# Altium PCB SPE_To_Ethernet.PcbDoc (part 1 of 3)
Units mm, origin at the board's own origin, x right, y up, seen from the top; angles counter-clockwise.
Board outline 152.4 x 101.6 mm, 4 copper layers (Top Layer, GND, Power, Bottom Layer), stack 1.526 mm thick; 154 components, 131 nets, 628 pads, 232 vias.
Unrouted connection lines stored in the file: 149.
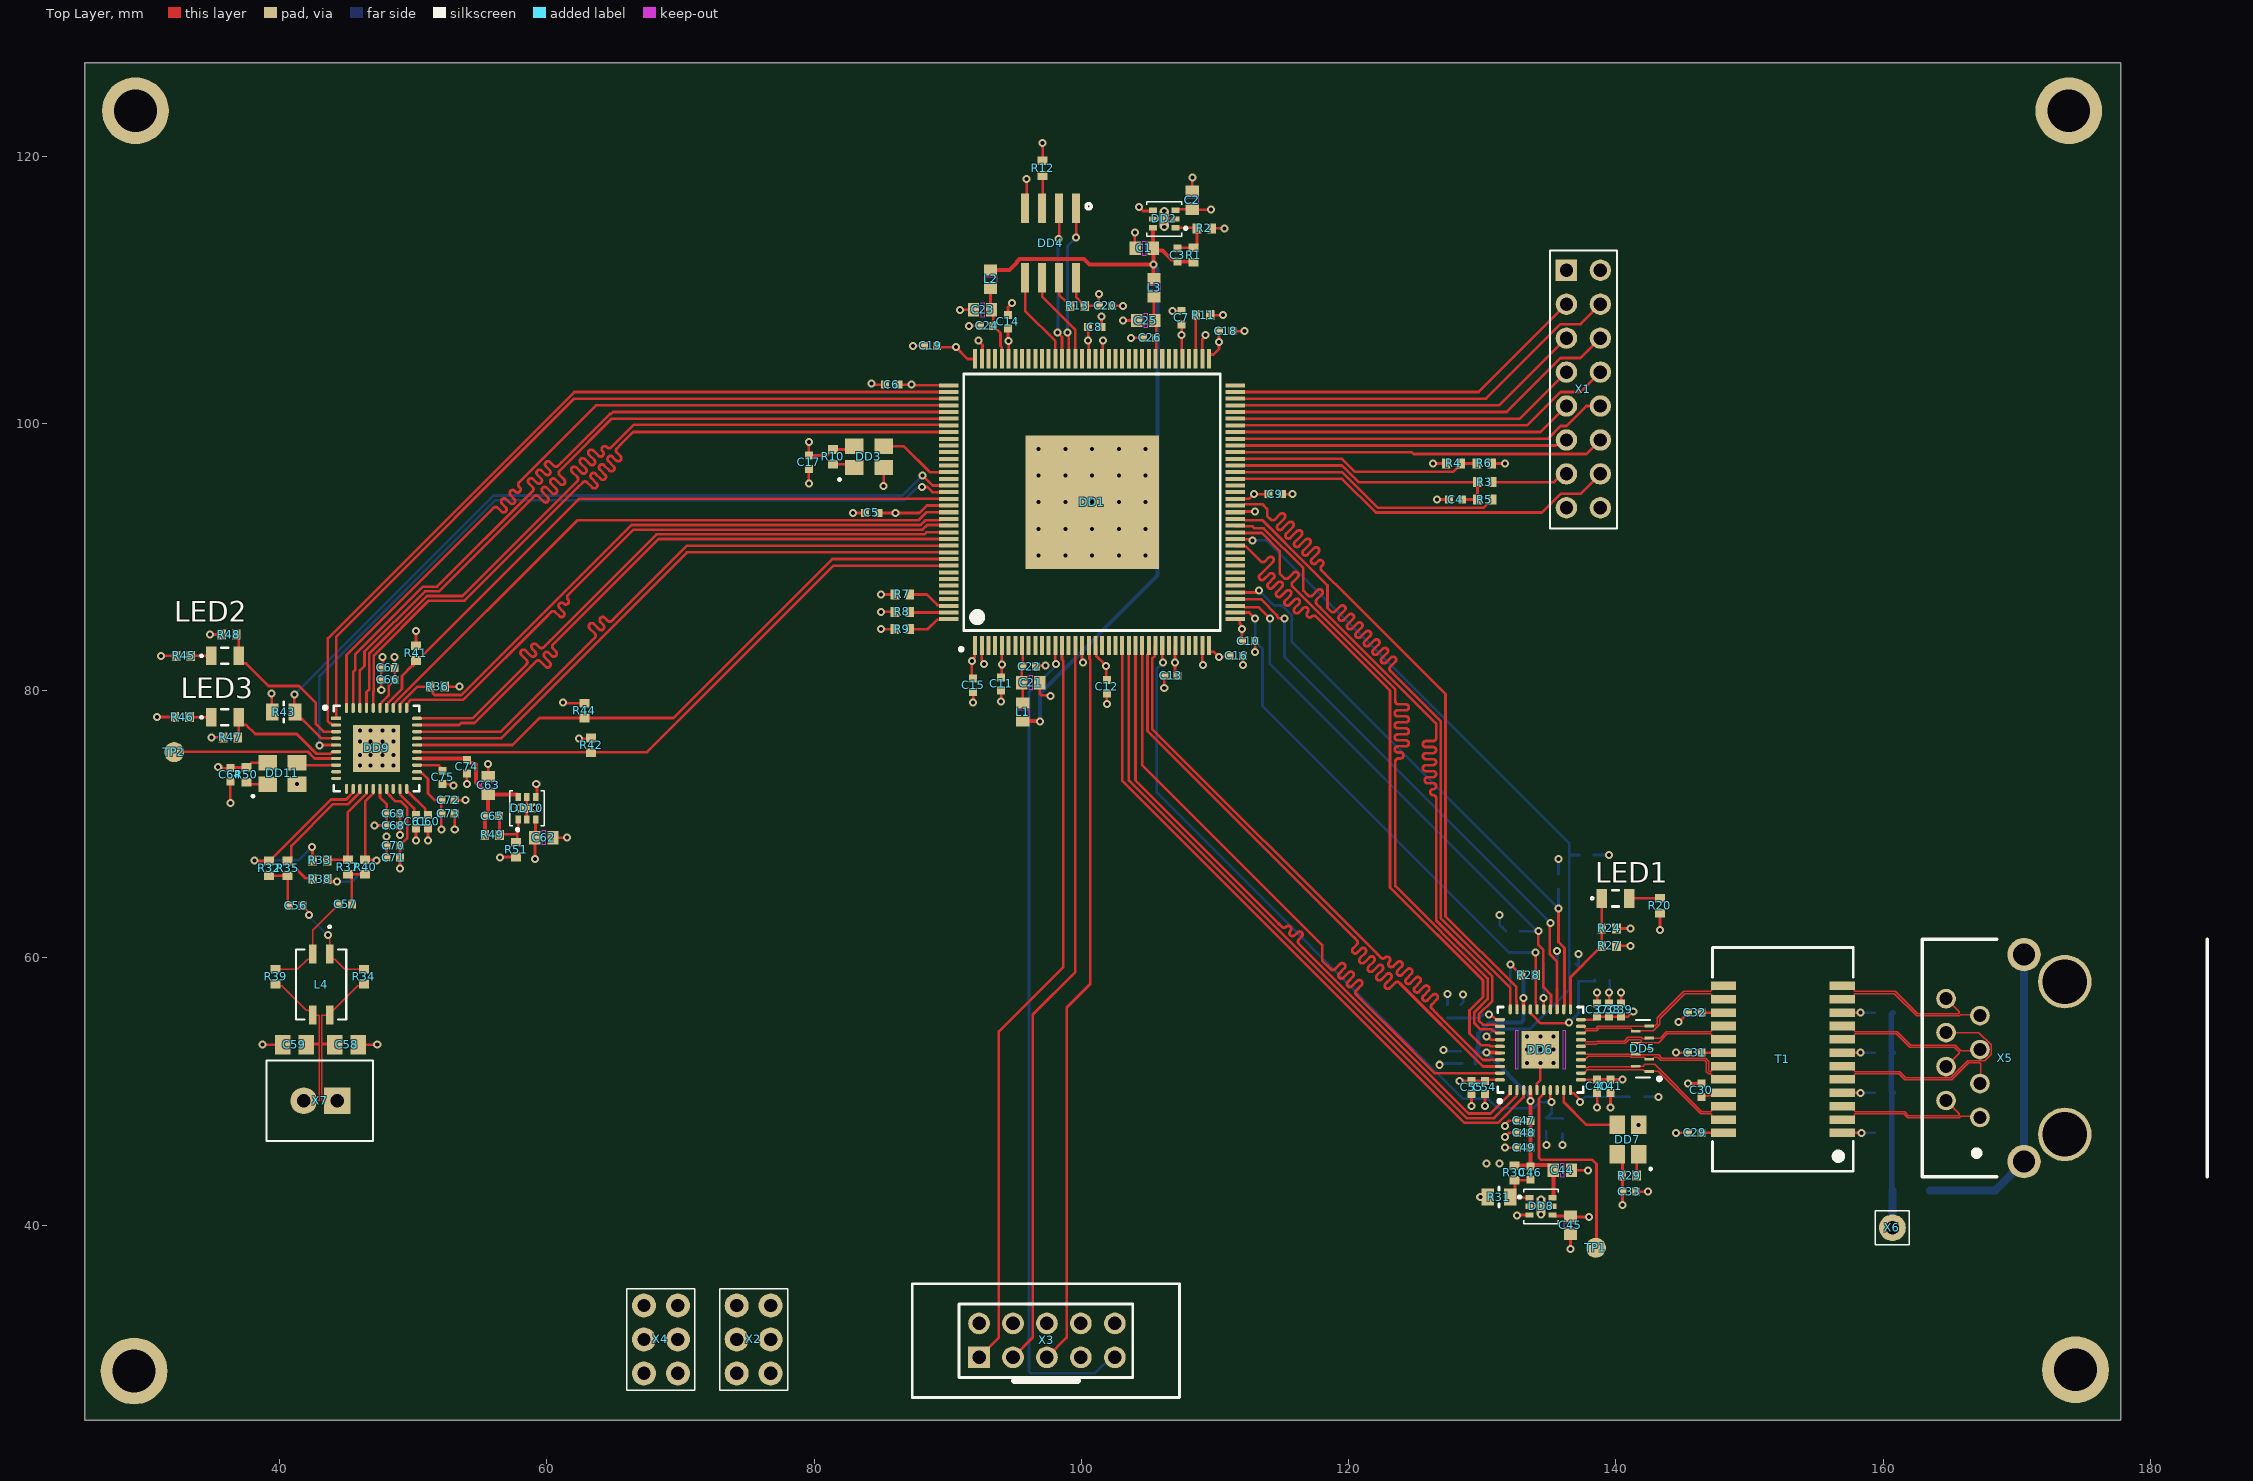
[diagram p0: Top Layer view]
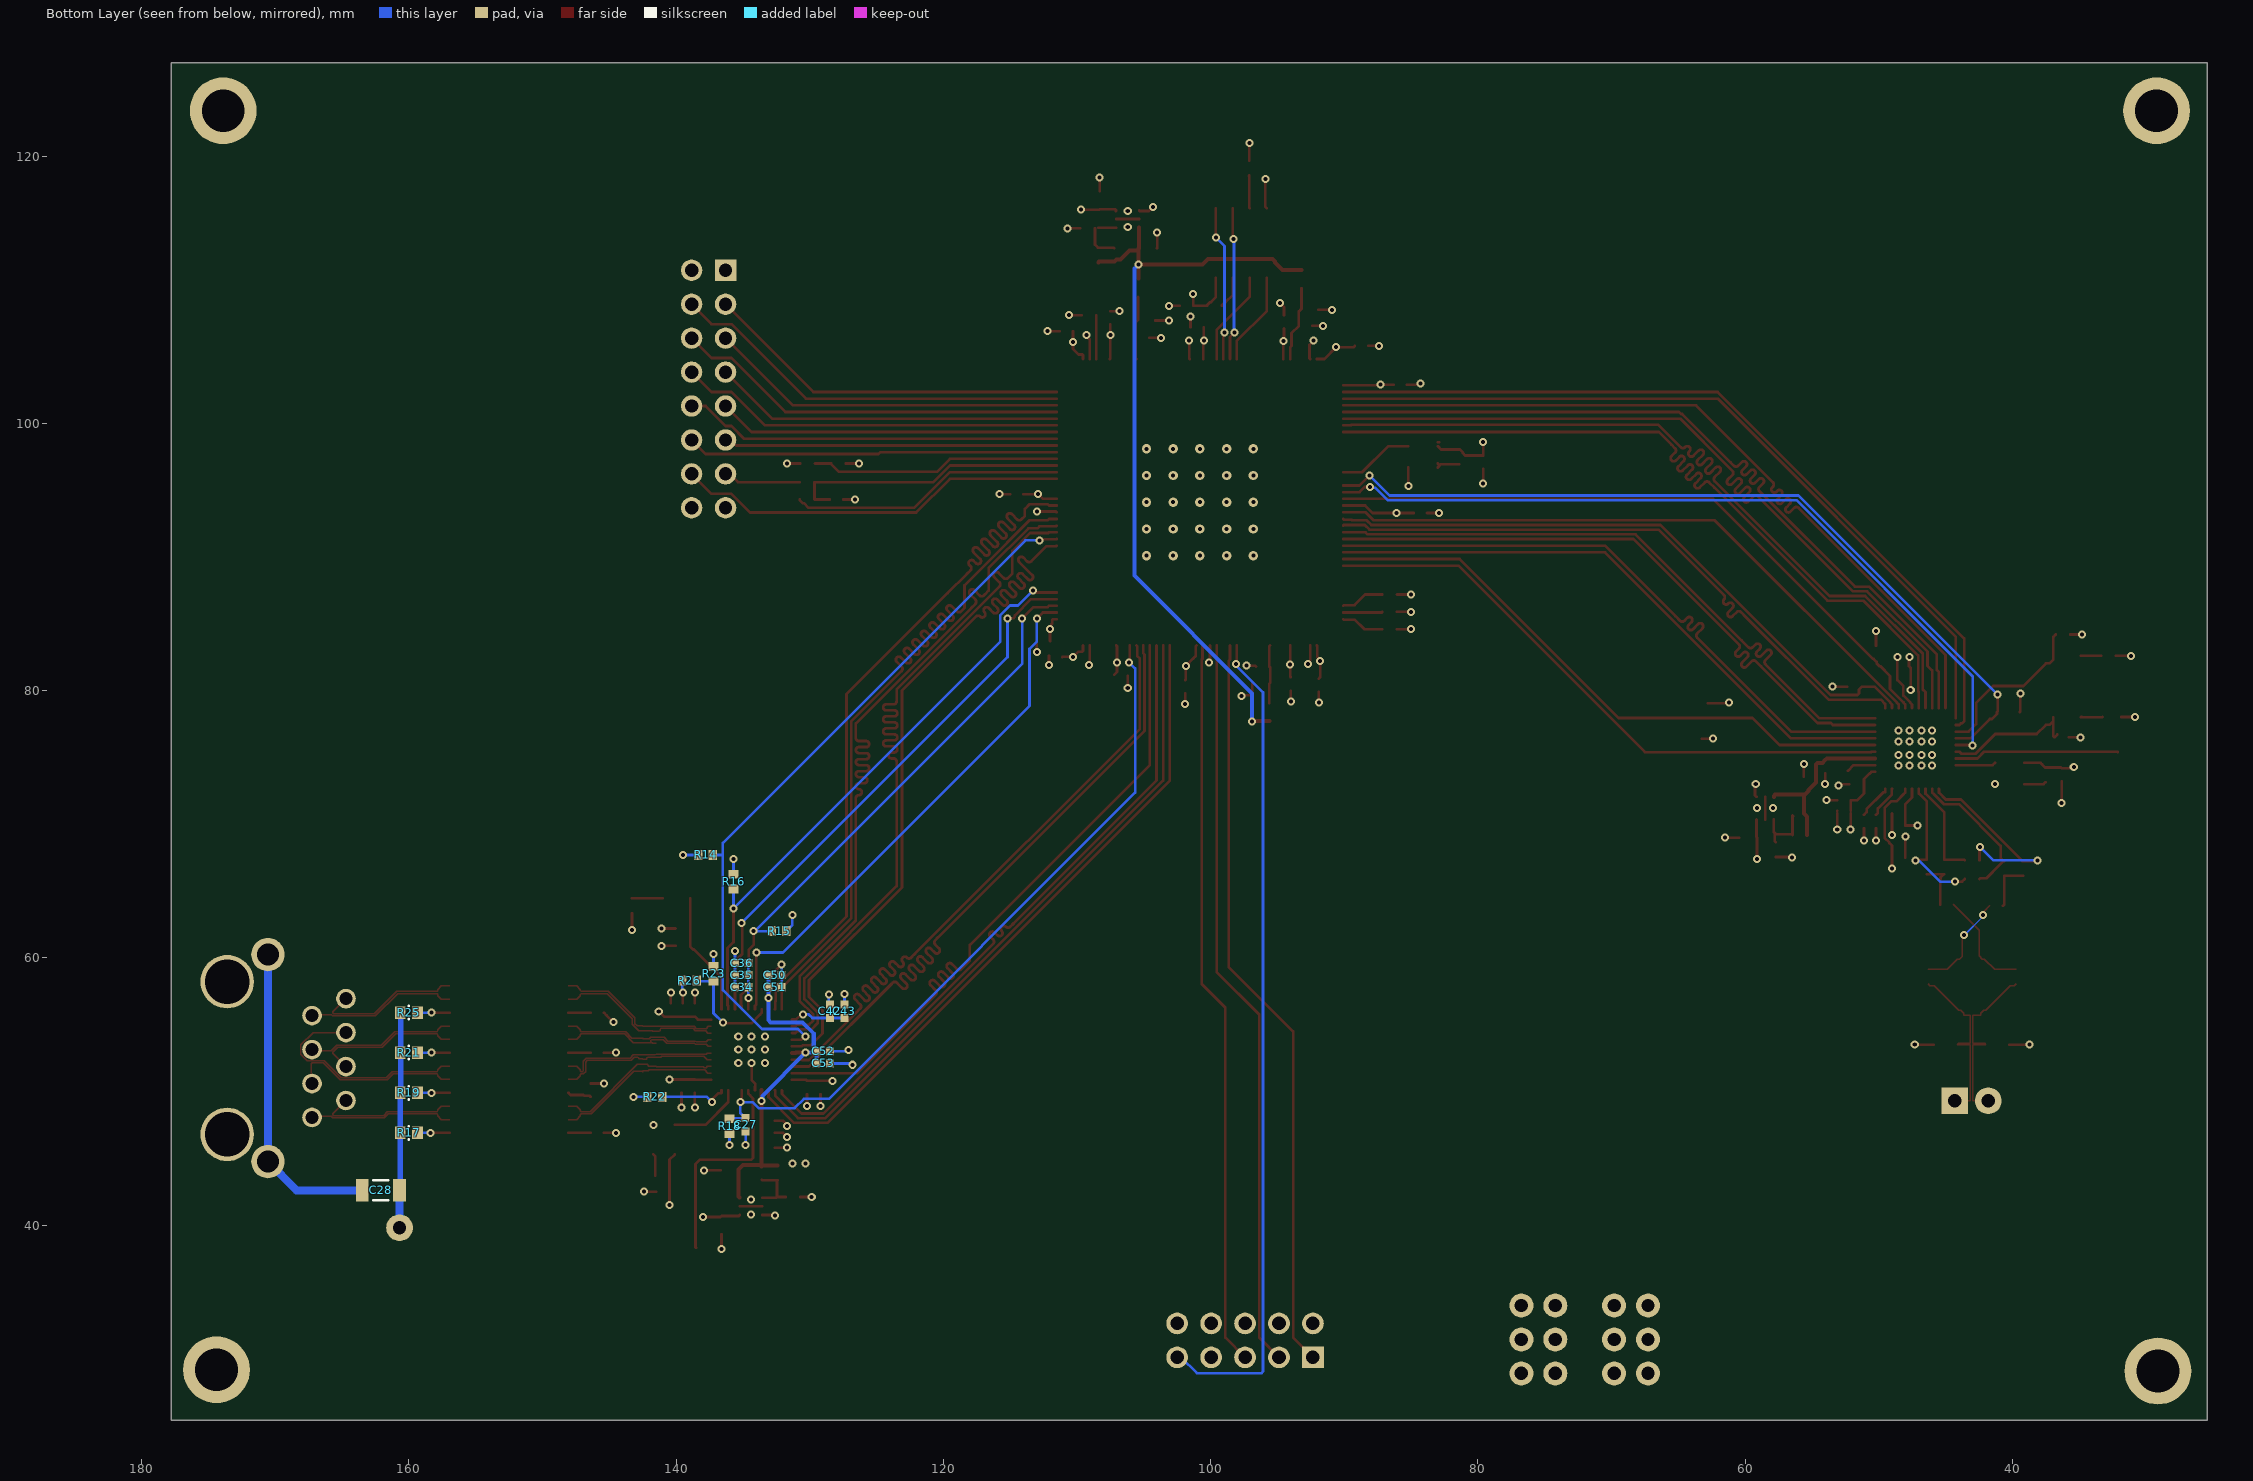
[diagram p1: Bottom Layer view, seen from below]
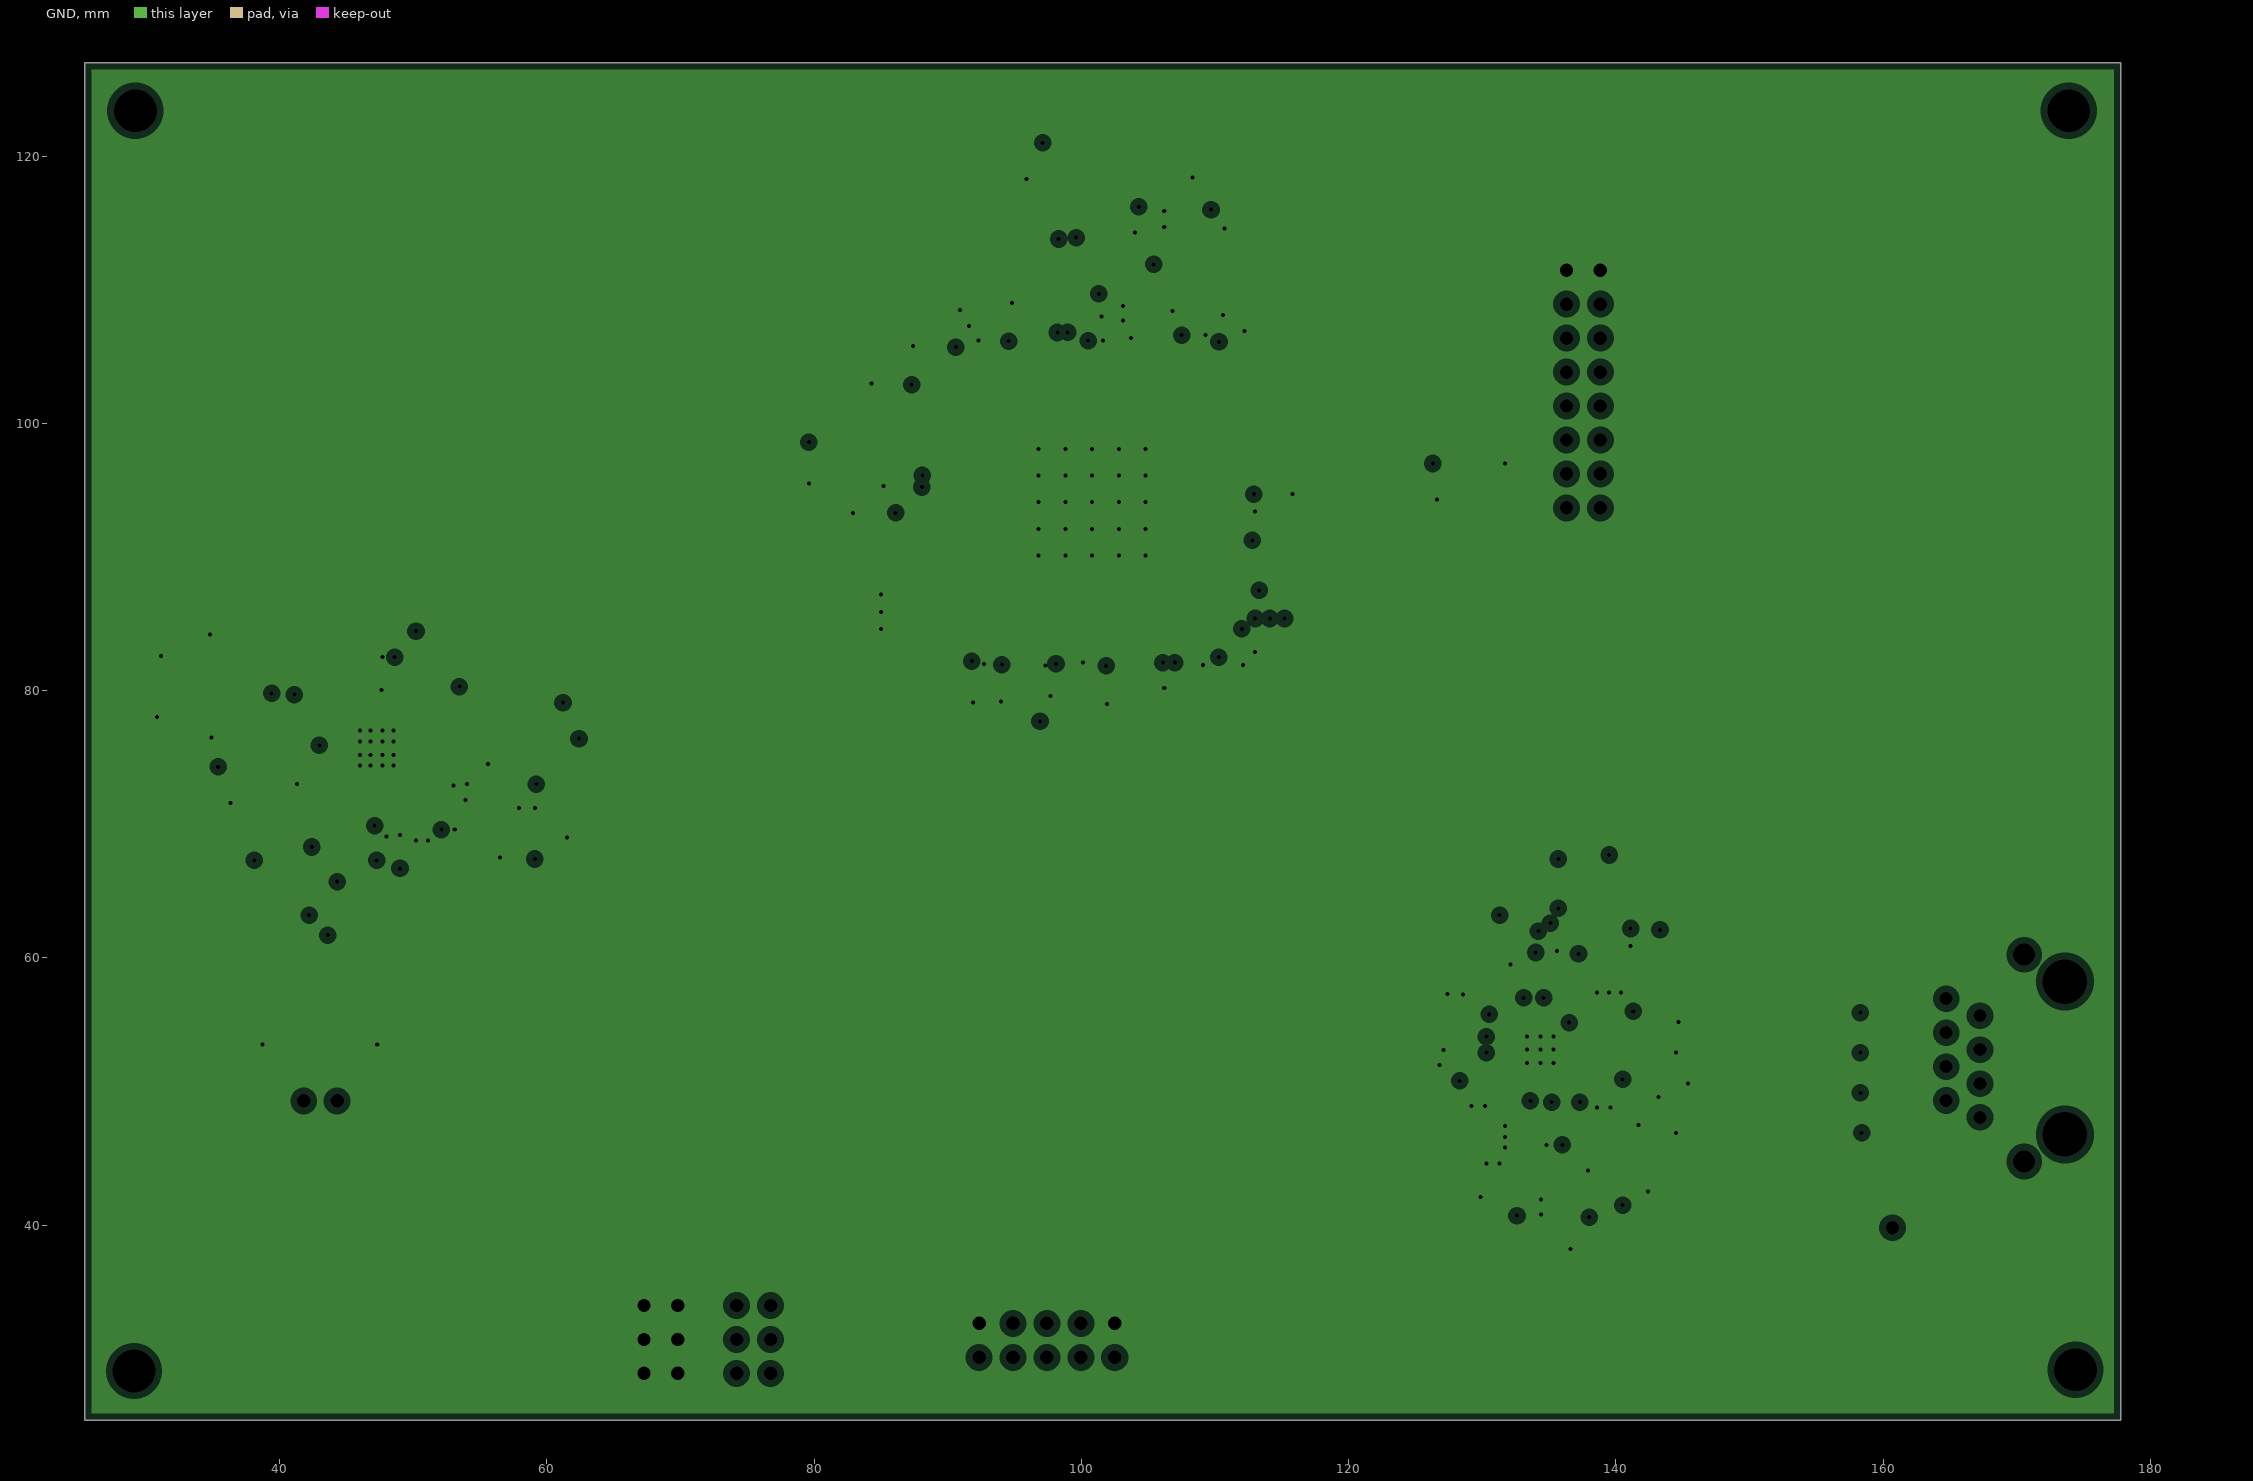
[diagram p2: GND, clearances drawn from the general rule]
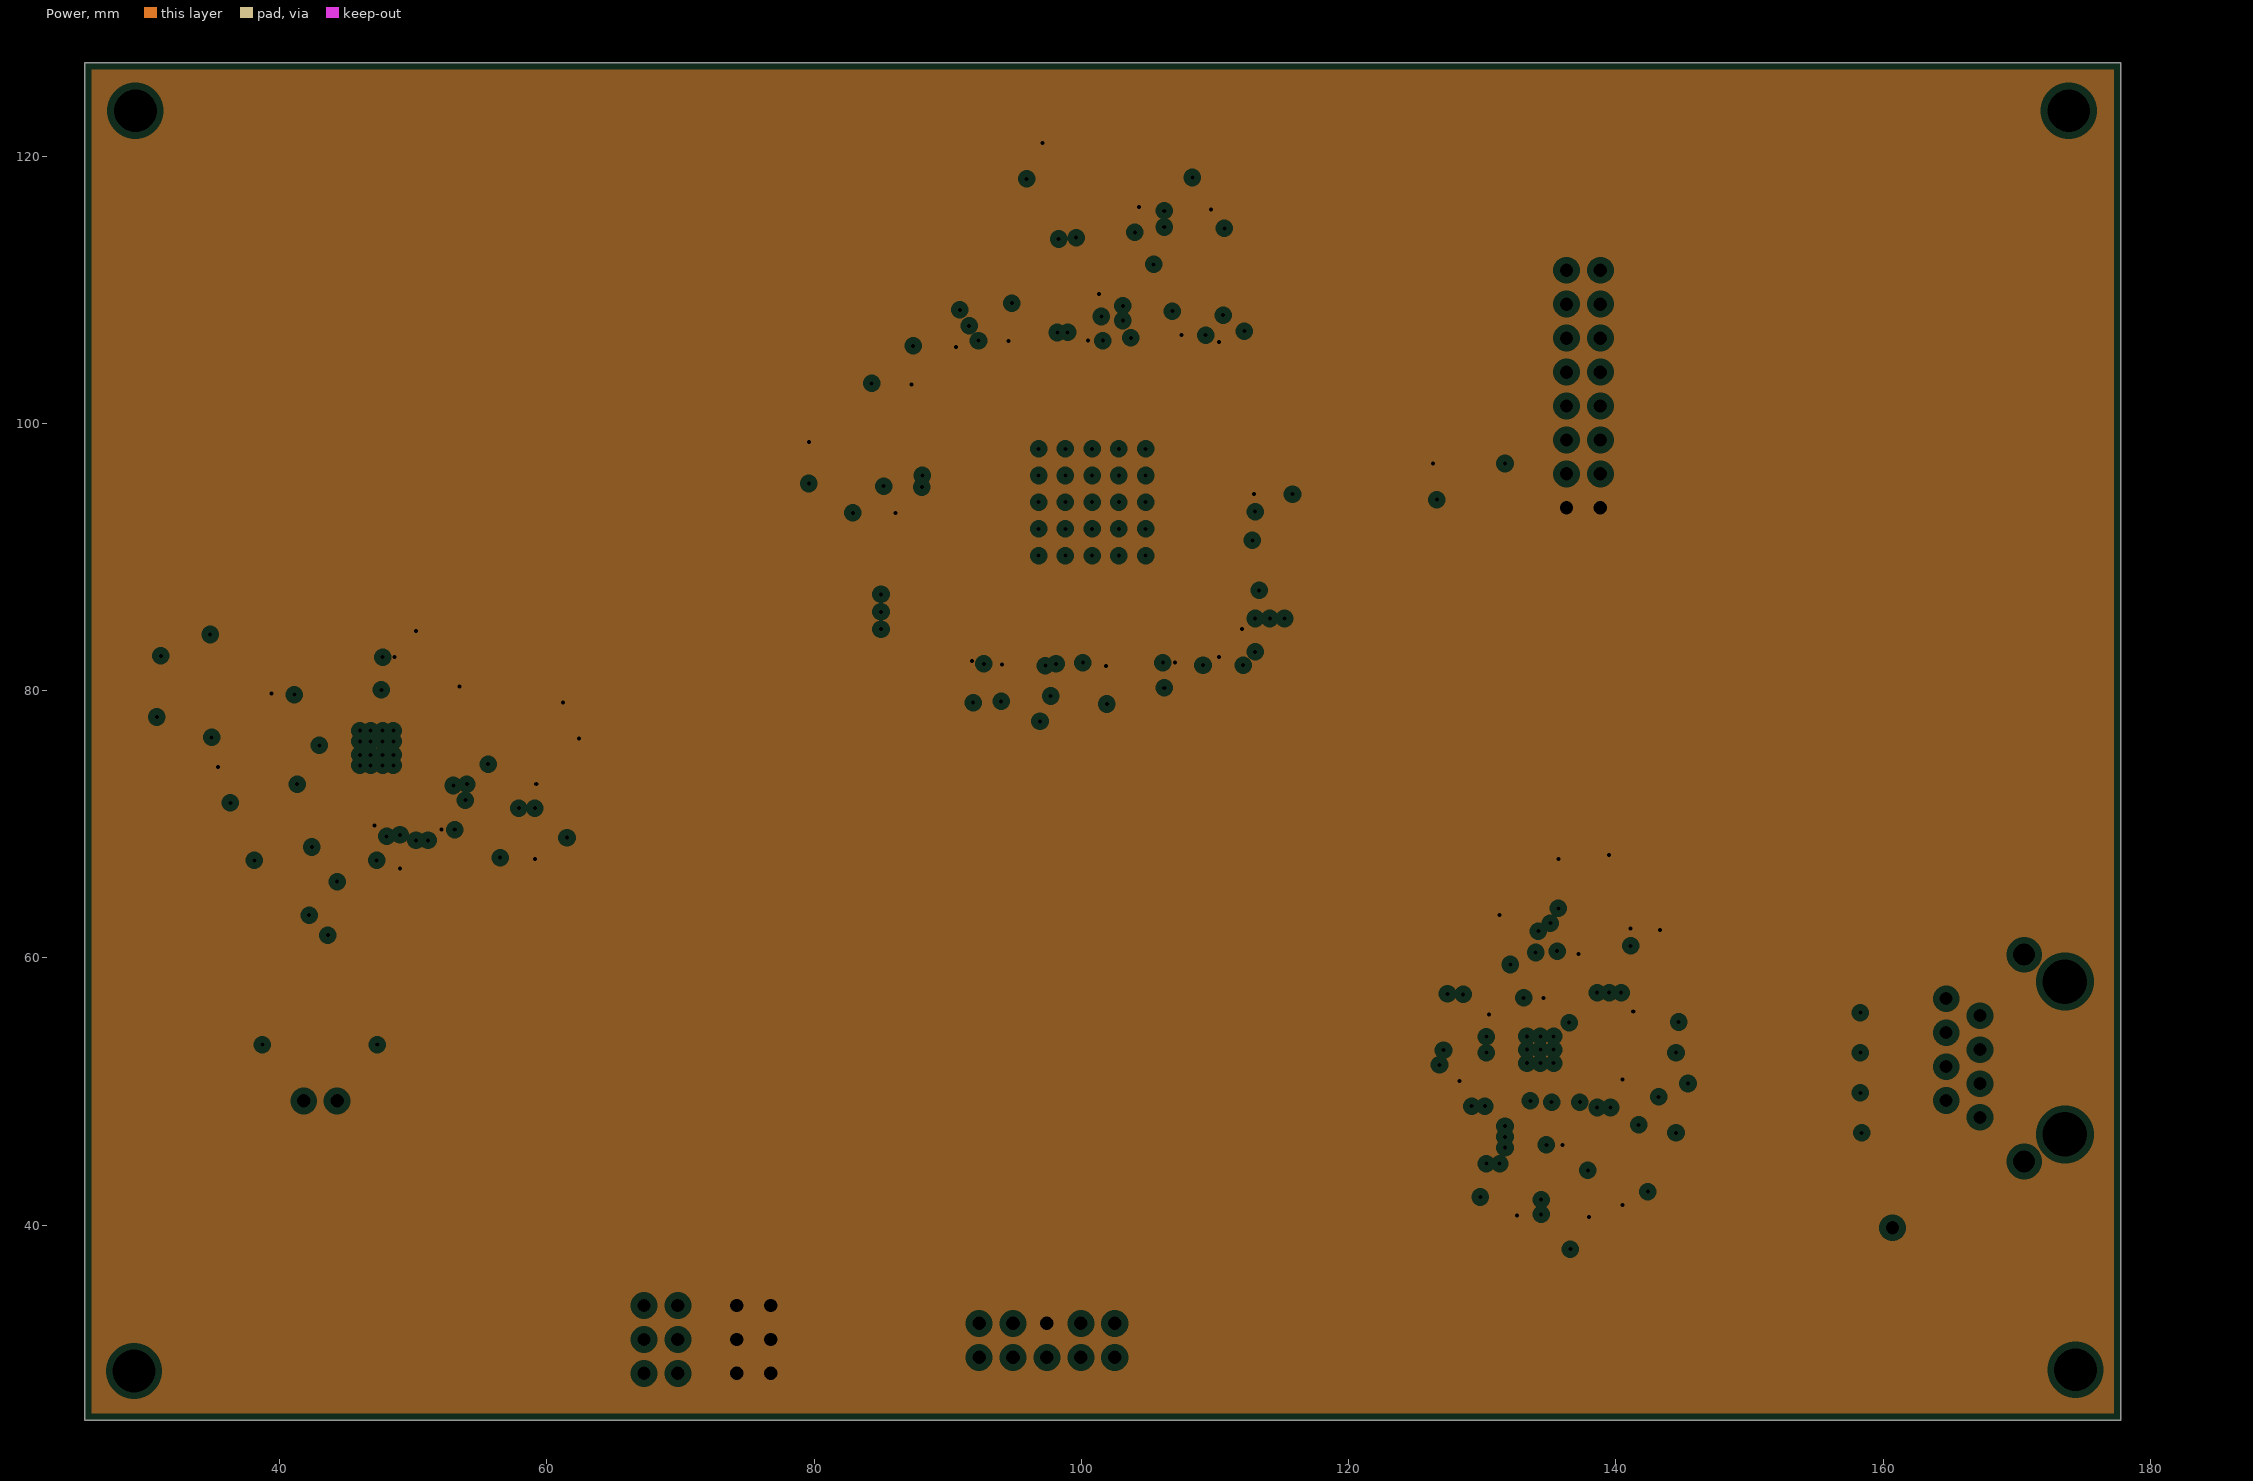
[diagram p3: Power, clearances drawn from the general rule]
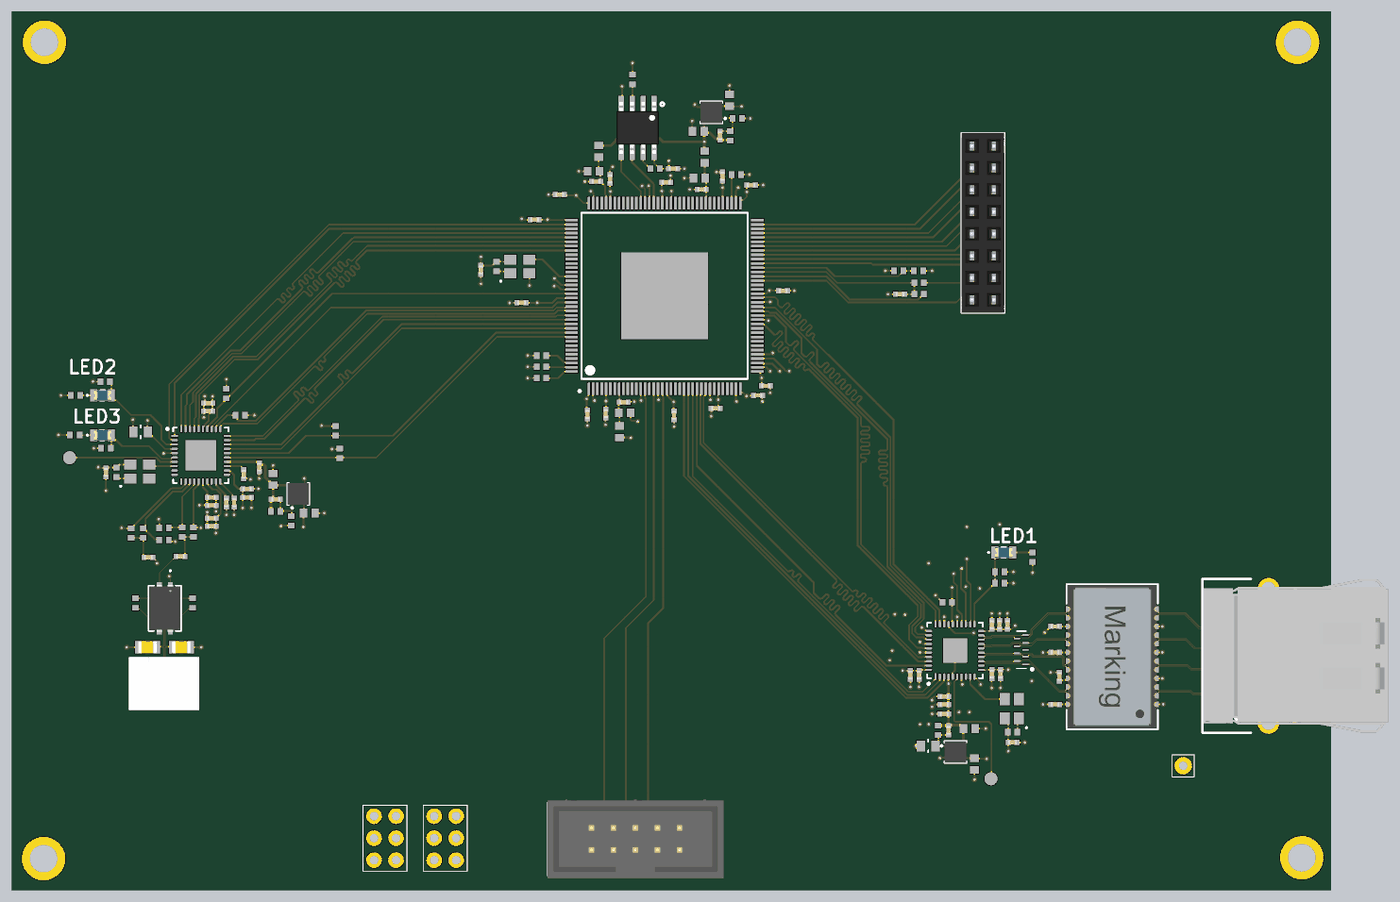
[diagram p5: 3D render of the assembled board from above, using the file's embedded part models]

## Layer stack, top to bottom
Top Solder: solder mask 0.0254, SM-001, Dk 3.5
Top Layer: signal copper 0.018
Dielectric 1: prepreg 0.127, FR4, Dk 4.2
GND: plane copper 0.018, net GND
Dielectric 2: core 1.2, FR4, Dk 4.6
Power: plane copper 0.018, net +3V3
Dielectric 3: prepreg 0.127, FR4, Dk 4.2
Bottom Layer: signal copper 0.018
Bottom Solder: solder mask 0.0254, SM-001, Dk 3.5

## Board outline
25.4,25.4 177.8,25.4 177.8,127 25.4,127

## Design rules (kind name [scope] priority, off if disabled: settings)
AssemblyTestPointUsage [All] p1: valid=2
AssemblyTestpoint [(IsPad And (OnTopLayer Or OnBottomLayer)) Or (IsVia) Or (IsPad And OnMultiLayer)] p1: testpointundercomponent=TRUE minsize=0.5 maxsize=2.54 preferedsize=1.524 minholesize=0 maxholesize=1.016 preferedholesize=0.813 testpointgrid=0.1 usegrid=FALSE gridtolerance=0 allowsidetop=TRUE allowsidebottom=TRUE
BoardOutlineClearance BoardOutlineClearance_1 [InComponent('X2') and OnTopSilkscreen] p1: gap=0 ignorepadtopadclearanceinfootprint=FALSE
BoardOutlineClearance [All] p2: gap=0.254 ignorepadtopadclearanceinfootprint=FALSE except(0: Arc-SplitContinuation Track-SplitContinuation SMDPad-SplitContinuation THPad-SplitContinuation Via-SplitContinuation Fill-SplitContinuation Poly-SplitContinuation Region-SplitContinuation Text-SplitContinuation)
Clearance [All] p1: gap=0.05 ignorepadtopadclearanceinfootprint=FALSE
DiffPairsRouting [All] p1: maxlimit=0.066 minlimit=0.066 mostfreqgap=0.066 toplayer_minwidth=0.1 toplayer_maxwidth=0.1 toplayer_prefwidth=0.1 bottomlayer_minwidth=0.1 bottomlayer_maxwidth=0.1 bottomlayer_prefwidth=0.1 impedanceprofiledriven=TRUE impedanceprofileid={1806372A-07BC-4097-8CD0-4FA6E6E3F08C} impedanceprofilevalue=100.000000 maxuncoupledlength=12.7
FabricationTestPointUsage [All] p1: valid=2 allowmultiple=FALSE
FabricationTestpoint [(IsPad And (OnTopLayer Or OnBottomLayer)) Or (IsVia) Or (IsPad And OnMultiLayer)] p1: side=3 testpointundercomponent=TRUE minsize=0.5 maxsize=2.54 preferedsize=1.524 minholesize=0 maxholesize=1.016 preferedholesize=0.813 testpointgrid=0.1 allowsidetop=TRUE allowsidebottom=TRUE usegrid=FALSE gridtolerance=0
HoleSize [All] p1: absolutevalues=TRUE maxlimit=4 minlimit=0.025 maxpercent=80.000 minpercent=20.000
LayerPairs LayerPairs_1 [IsDesignator] p1: enforce=TRUE
LayerPairs [All] p2: enforce=TRUE
Length [InxSignalClass('All xSignals')] p1: maxlimit=150 minlimit=0
MatchedLengths MatchLengths_SPE_Rx [InxSignalClass('SPE_Rx')] p1: tolerance=2 checknetsindiffpair=FALSE checkdiffpairvsdiffpair=TRUE checkxsignals=TRUE checkothers=TRUE
MatchedLengths MatchLengths_SPE_Tx [InxSignalClass('SPE_Tx')] p2: tolerance=2 checknetsindiffpair=FALSE checkdiffpairvsdiffpair=TRUE checkxsignals=TRUE checkothers=TRUE
MatchedLengths MatchLengths_ETH_Rx [InxSignalClass('ETH_Rx')] p3: tolerance=2 checknetsindiffpair=FALSE checkdiffpairvsdiffpair=TRUE checkxsignals=TRUE checkothers=TRUE
MatchedLengths MatchLengths_ETH_Tx [InxSignalClass('ETH_Tx')] p4: tolerance=2 checknetsindiffpair=FALSE checkdiffpairvsdiffpair=TRUE checkxsignals=TRUE checkothers=TRUE
MatchedLengths [InDifferentialPair('D1') and InDifferentialPair('D2') and InDifferentialPair('D3') and InDifferentialPair('D4')] p5: tolerance=0.25 checknetsindiffpair=TRUE checkdiffpairvsdiffpair=FALSE checkxsignals=FALSE checkothers=FALSE
MinimumAnnularRing MinimumAnnularRing_Via [All] p1: minimumring=0.15
MinimumAnnularRing [All] p2: minimumring=0.2
MinimumSolderMaskSliver [All] p1: minsoldermaskwidth=0
PlaneClearance [All] p1: clearance=0.508
PlaneConnect [All] p1: pad.planeconnectstyle=Relief pad.reliefexpansion=0.3 pad.reliefentries=4 pad.reliefconductorwidth=0.3 pad.reliefairgap=0.3 via.planeconnectstyle=Direct via.reliefexpansion=0.3 via.reliefentries=4 via.reliefconductorwidth=0.3 via.reliefairgap=0.3
PolygonConnect PolygonConnect_1 [All vs IsVia] p1: connectstyle=Direct reliefconductorwidth=0.254 reliefentries=4 polygonreliefangle="90 Angle" airgapwidth=0.254
PolygonConnect [All] p2: connectstyle=Relief reliefconductorwidth=0.254 reliefentries=4 polygonreliefangle="90 Angle" airgapwidth=0.254
RoutingVias [All] p1: holewidth=0.3 width=0.6 viastyle="Through Hole" minholewidth=0.3 minwidth=0.6 maxholewidth=1 maxwidth=5
SilkToSilkClearance [All] p1: silktosilkclearance=0.1
SilkToSolderMaskClearance [IsPad] p1: minsilkscreentomaskgap=0.1 clearancetoexposedcopper=TRUE
SolderMaskExpansion SolderMaskExpansion_Via [IsVia] p1: expansion=0.102 istentingtop=TRUE
SolderMaskExpansion [All] p2: expansion=0.102 istentingtop=FALSE
Width Width_50 [InNetClass('50Ohm')] p1: maxlimit=0.143 minlimit=0.143 preferedwidth=0.143 impedanceprofiledriven=TRUE minimp=50.000000 maximp=50.000000 favimp=50.000000
Width [All] p2: maxlimit=2 minlimit=0.1 preferedwidth=0.2
18 further rules are at their usual default settings.

## Classes and differential pairs
differential pair class Diff_100: D1_3 D2_3 D3_3 D4_3 MDI_0_3 MDI_1_3 MDI_2_3 MDI_3_3
net class Diff_pair: D1_3_N D1_3_P D2_3_N D2_3_P D3_3_N D3_3_P D4_3_N D4_3_P MDI_0_3_N MDI_0_3_P MDI_1_3_N MDI_1_3_P MDI_2_3_N MDI_2_3_P MDI_3_3_N MDI_3_3_P
component class U_SPE_Phy: C56 C57 C58 C59 C60 C61 C62 C63 C64 C65 C66 C67 C68 C69 C70 C71 C72 C73 C74 C75 DD9 DD10 DD11 L4 LED2 LED3 R32 R33 R34 R35 R36 R37 R38 R39 R40 R41 R42 R43 R44 R45 R46 R47 R48 R49 R50 R51 TP2 X7
component class U_FPGA: C1 C2 C3 C4 C5 C6 C7 C8 C9 C10 C11 C12 C13 C14 C15 C16 C17 C18 C19 C20 C21 C22 C23 C24 C25 C26 DD1 DD2 DD3 DD4 L1 L2 L3 R1 R2 R3 R4 R5 R6 R7 R8 R9 R10 R11 R12 R13 X1 X2 X3 X4
component class U_Ethernet_Phy: C27 C28 C29 C30 C31 C32 C33 C34 C35 C36 C37 C38 C39 C40 C41 C42 C43 C44 C45 C46 C47 C48 C49 C50 C51 C52 C53 C54 C55 DD5 DD6 DD7 DD8 LED1 R14 R15 R16 R17 R18 R19 R20 R21 R22 R23 R24 R25 R26 R27 R28 R29 R30 R31 T1 TP1 X5 X6
differential pair MDI_3_3: +MDI_3_3_P -MDI_3_3_N
differential pair MDI_2_3: +MDI_2_3_P -MDI_2_3_N
differential pair MDI_1_3: +MDI_1_3_P -MDI_1_3_N
differential pair MDI_0_3: +MDI_0_3_P -MDI_0_3_N
differential pair DATA_4: +DATA_4_P -DATA_4_N
differential pair D4_3: +D4_3_P -D4_3_N
differential pair D3_3: +D3_3_P -D3_3_N
differential pair D2_3: +D2_3_P -D2_3_N
differential pair D1_3: +D1_3_P -D1_3_N

## Components (designator, comment, footprint, x,y, rotation, side; value= is the part's Value field where it differs from the comment)
C1 "10uF 25V" CAPC0603N 104.7,113.1 r0 top value=10uF
C2 "10uF 25V" CAPC0603N 108.3,116.7 r270 top value=10uF
C3 "22pF 50V" CAP0402 107.2,112.6 r90 top locked value=22pF
C4 "100 nF *" CAP0402 128,94.3 r0 top value="100 nF"
C5 "100 nF 50V" CAP0402 84.3,93.3 r0 top value="100 nF"
C6 "100 nF 50V" CAP0402 85.8,102.9 r0 top value="100 nF"
C7 "100 nF 50V" CAP0402 107.5,107.9 r270 top value="100 nF"
C8 "100 nF 50V" CAP0402 101,107.2 r180 top value="100 nF"
C9 "100 nF 50V" CAP0402 114.5,94.7 r180 top value="100 nF"
C10 "100 nF 50V" CAP0402 112.5,83.7 r180 top value="100 nF"
C11 "100 nF 50V" CAP0402 94,80.5 r90 top value="100 nF"
C12 "100 nF 50V" CAP0402 101.9,80.3 r90 top value="100 nF"
C13 "100 nF 50V" CAP0402 106.7,81.1 r0 top value="100 nF"
C14 "100 nF 50V" CAP0402 94.5,107.6 r270 top value="100 nF"
C15 "100 nF 50V" CAP0402 91.9,80.4 r90 top value="100 nF"
C16 "100 nF 50V" CAP0402 111.6,82.6 r180 top value="100 nF"
C17 "100nF 50V" CAP0402 79.6,97.1 r90 top value=100nF
C18 "100 nF 50V" CAP0402 110.8,106.9 r180 top value="100 nF"
C19 "100 nF 50V" CAP0402 88.7,105.8 r0 top value="100 nF"
C20 "100 nF 50V" CAP0402 101.8,108.8 r180 top value="100 nF"
C21 "10uF 25V" CAPC0603N 96.2,80.6 r180 top locked value=10uF
C22 "100 nF 50V" CAP0402 96.1,81.8 r180 top value="100 nF"
C23 "10uF 25V" CAPC0603N 92.6,108.5 r0 top value=10uF
C24 "100 nF 50V" CAP0402 92.9,107.3 r0 top locked value="100 nF"
C25 "10uF 25V" CAPC0603N 104.825,107.7 r0 top value=10uF
C26 "100 nF 50V" CAP0402 105.1,106.4 r0 top locked value="100 nF"
C27 "10nF 50V" CAP0402 134.8,47.5 r90 bottom locked value=10nF
C28 "2,2 nF 2 kV" CAPC1206(3216)150_L 162.1,42.6 r180 bottom locked value="2,2 nF"
C29 "100nF 50V" CAP0402 145.9,46.9 r0 top locked value=100nF
C30 "100nF 50V" CAP0402 146.4,50.1 r270 top locked value=100nF
C31 "100nF 50V" CAP0402 145.9,52.9 r0 top locked value=100nF
C32 "100nF 50V" CAP0402 145.9,55.9 r0 top locked value=100nF
C33 "100nF 50V" CAP0402 141,42.5 r180 top value=100nF
C34 "100nF 50V" CAP0402 135.1,57.8 r180 bottom value=100nF
C35 "10nF 50V" CAP0402 135.1,58.7 r180 bottom value=10nF
C36 "1uF 25V" CAP0402 135.1,59.6 r180 bottom value=1uF
C37 "1uF 25V" CAP0402 138.6,56.1 r270 top value=1uF
C38 "100nF 50V" CAP0402 139.5,56.1 r270 top value=100nF
C39 "10nF 50V" CAP0402 140.4,56.1 r270 top value=10nF
C40 "100nF 50V" CAP0402 138.6,50.4 r90 top value=100nF
C41 "10nF 50V" CAP0402 139.6,50.4 r90 top value=10nF
C42 "100nF 50V" CAP0402 128.5,56 r270 bottom value=100nF
C43 "10nF 50V" CAP0402 127.4,56 r270 bottom value=10nF
C44 "10uF 25V" CAPC0603N 136,44.1 r180 top value=10uF
C45 "10uF 25V" CAPC0603N 136.6,40 r90 top value=10uF
C46 "22pF 50V" CAP0402 133.6,43.9 r270 top value=22pF
C47 "1uF 25V" CAP0402 133.1,47.8 r0 top value=1uF
C48 "100nF 50V" CAP0402 133.1,46.9 r0 top value=100nF
C49 "10nF 50V" CAP0402 133.1,45.8 r0 top value=10nF
C50 "100nF 50V" CAP0402 132.6,58.7 r0 bottom value=100nF
C51 "10nF 50V" CAP0402 132.6,57.8 r0 bottom value=10nF
C52 "100nF 50V" CAP0402 129,53 r0 bottom value=100nF
C53 "10nF 50V" CAP0402 129,52.1 r0 bottom locked value=10nF
C54 "100nF 50V" CAP0402 130.2,50.3 r90 top value=100nF
C55 "10nF 50V" CAP0402 129.2,50.3 r90 top value=10nF
C56 "220nF *" CAP0402 41.2,63.9 r0 top locked value=220nF
C57 "220nF *" CAP0402 44.9,64 r180 top locked value=220nF
C58 "100 nF 1kV" CAPC0805N 45,53.5 r180 top value="100 nF"
C59 "100 nF 1kV" CAPC0805N 41.1,53.5 r0 top value="100 nF"
C60 "1uF *" CAP0402 51.1,70.2 r90 top locked value=1uF
C61 "0,1uF *" CAP0402 50.2,70.2 r90 top locked value=0,1uF
C62 "10uF 25V" CAPC0603N 59.775,69 r180 top value=10uF
C63 "10uF *" CAPC0603N 55.6,72.9 r270 top value=10uF
C64 "100nF *" CAP0402 36.3,73.7 r90 top value=100nF
C65 "22pF 50V" CAP0402 55.9,70.6 r0 top value=22pF
C66 "100nF *" CAP0402 48.1,80.8 r0 top value=100nF
C67 "10nF *" CAP0402 48.1,81.7 r0 top value=10nF
C68 "100nF *" CAP0402 48.5,69.9 r180 top value=100nF
C69 "10nF *" CAP0402 48.5,70.8 r180 top value=10nF
C70 "100nF *" CAP0402 48.5,68.4 r0 top value=100nF
C71 "10nF *" CAP0402 48.5,67.5 r0 top value=10nF
C72 "100nF *" CAP0402 52.6,71.8 r180 top value=100nF
C73 "10nF *" CAP0402 52.6,70.8 r180 top value=10nF
C74 "100nF *" CAP0402 54,74.3 r90 top value=100nF
C75 "680nF *" CAP0402 52.2,73.5 r90 top locked value=680nF
DD1 "Value" EQ144 100.8,94.1 r90 top
DD2 "" 171010550 106.2,115.3 r180 top
DD3 "25MHz" TSX-3225_V 84.1,97.5 r0 top locked
DD4 "" SO-8 97.7,113.5 r270 top locked
DD5 "" U-DFN3810-9 142,53.2 r90 top
DD6 "" LFCSP-40 134.35,53.125 r90 top
DD7 "" TSX-3225_V 140.9,46.4 r90 top locked value=25MHz
DD8 "" 171010550 134.4,41.4 r0 top
DD9 "Value" LFCSP-40-01 47.25,75.675 r0 top
DD10 "" 171010550 58.5,71.2 r90 top
DD11 "25MHz" TSX-3225_V 40.2,73.8 r0 top locked
L1 "" CAPC0603N 95.6,78.4 r90 top
L2 "" CAPC0603N 93.2,110.8 r270 top locked
L3 "" CAPC0603N 105.438,110.138 r270 top
L4 "350 uH" CHOKE_242471_WRE 43.1,58 r270 top
LED1 "Green" LED0805 139.975,64.45 r0 top
LED2 "Green" LED0805 35.9,82.6 r0 top
LED3 "Green" LED0805 35.9,78 r0 top
R1 "100kOhm" RESC0402(1005)_M 108.4,112.6 r90 top
R2 "390kOhm" RESC0402(1005)_M 109.2,114.6 r180 top
R3 "10kOhm" RESC0402(1005)_M 130.2,95.6 r0 top locked
R4 "10kOhm" RESC0402(1005)_M 127.85,97 r180 top
R5 "10kOhm" RESC0402(1005)_M 130.2,94.3 r180 top locked
R6 "10kOhm" RESC0402(1005)_M 130.15,97 r180 top locked
R7 "4,7kOhm" RESC0402(1005)_M 86.6,87.2 r0 top locked
R8 "4,7kOhm" RESC0402(1005)_M 86.6,85.9 r0 top locked
R9 "4,7kOhm" RESC0402(1005)_M 86.6,84.6 r0 top locked
R10 "10kohm" RESC0402(1005)_M 81.4,97.5 r270 top
R11 "10 kOhm" RESC0402(1005)_M 109.1,108.1 r0 top locked
R12 "4,7 kOhm" RESC0402(1005)_M 97.1,119.1 r270 top
R13 "4,7 kOhm" RESC0402(1005)_M 99.7,108.8 r0 top
R14 "1.5kohm" RESC0402(1005)_M 137.8,67.7 r0 bottom locked
R15 "1.5kohm" RESC0402(1005)_M 132.3,62 r0 bottom locked
R16 "1.5kohm" RESC0402(1005)_M 135.7,65.7 r270 bottom locked
R17 "75 Ohm" RESC0603N 160,46.9 r180 bottom locked
R18 "10kohm" RESC0402(1005)_M 136,47.4 r270 bottom
R19 "75 Ohm" RESC0603N 160,49.9 r180 bottom locked
R20 "0 ohm" RESC0402(1005)_M 143.3,63.9 r270 top
R21 "75 Ohm" RESC0603N 160,52.9 r180 bottom locked
R22 "3.01kohm" RESC0402(1005)_M 141.6,49.6 r180 bottom locked
R23 "10kohm" RESC0402(1005)_M 137.2,58.8 r90 bottom locked
R24 "56kohm" RESC0402(1005)_M 139.5,62.2 r0 top
R25 "75 Ohm" RESC0603N 160,55.9 r180 bottom locked
R26 "56kohm" RESC0402(1005)_M 139,58.3 r180 bottom
R27 "10kohm" RESC0402(1005)_M 139.5,60.9 r180 top locked
R28 "10kohm" RESC0402(1005)_M 133.45,58.7 r0 top locked
R29 "10kohm" RESC0402(1005)_M 141,43.7 r0 top locked
R30 "100kOhm" RESC0402(1005)_M 132.4,43.9 r270 top
R31 "787 kOhm" RESC0805L 131.25,42.1 r0 top locked
R32 "49,9Ohm" RESC0402(1005)_M 39.2,66.7 r270 top
R33 "10,2kOhm" RESC0402(1005)_M 43,67.3 r180 top locked
R34 "10kOhm" RESC0402(1005)_M 46.3,58.6 r90 top
R35 "5,1kOhm" RESC0402(1005)_M 40.6,66.7 r270 top locked
R36 "10kOhm" RESC0402(1005)_M 51.8,80.3 r0 top locked
R37 "5,1kOhm" RESC0402(1005)_M 45.1,66.8 r270 top
R38 "10,2kOhm" RESC0402(1005)_M 43,65.9 r0 top
R39 "10kOhm" RESC0402(1005)_M 39.7,58.6 r90 top
R40 "49,9Ohm" RESC0402(1005)_M 46.4,66.8 r270 top locked
R41 "10kOhm" RESC0402(1005)_M 50.2,82.8 r90 top
R42 "1.5kOhm" RESC0402(1005)_M 63.3,75.9 r270 top
R43 "4,7kOhm" RESC0805L 40.3,78.4 r180 top locked
R44 "1.5kOhm" RESC0402(1005)_M 62.8,78.5 r270 top
R45 "4,7kOhm" RESC0402(1005)_M 32.8,82.6 r0 top
R46 "4,7kOhm" RESC0402(1005)_M 32.7,78.025 r0 top
R47 "4,7kOhm" RESC0402(1005)_M 36.3,76.5 r180 top locked
R48 "4,7kOhm" RESC0402(1005)_M 36.2,84.2 r180 top locked
R49 "100kOhm" RESC0402(1005)_M 55.9,69.2 r0 top locked
R50 "10kohm" RESC0402(1005)_M 37.5,73.7 r270 top
R51 "270kOhm" RESC0402(1005)_M 57.7,68.1 r90 top
T1 "180 uH" 749023310 152.5,52.4 r270 top locked
TP1 "TP-SINGLE-ROUND" TP-ROUND-TOP-1.5 138.5,38.3 r0 top locked
TP2 "TP-SINGLE-ROUND" TP-ROUND-TOP-1.5 32.1,75.4 r90 top locked
X1 "" PBD16 137.57,102.63 r270 top
X2 "PLD-6" PLD_6 74.2,28.9 r90 top
X3 "BH-10" BH-10 97.42,31.37 r0 top locked
X4 "PLD-6" PLD_6 67.26,28.9 r90 top
X5 "5406299-1" RJ-45_5406299-1 173.6,52.5 r90 top
X6 "PLS1" PLS1 160.7,39.8 r270 top
X7 "XH-2A" X_XH-2A_2.5 44.3,49.3 r180 top locked

## Footprints (in the part's own frame and the unit in brackets; to place one, negate y for a bottom-side part, rotate by r counter-clockwise, add the part's x,y. Pads: shape width x height; smd on the part's side, far side on the other; paste and mask are expansions set on the pad)
171010550 [mm] "Variable Step Down MicroModule, body 2.5x2.5mm"
  rect 0.6x0.4 smd: 1(-0.85,0.65) 2(-0.85,0) 3(-0.85,-0.65) 4(0.85,-0.65) 5(0.85,0) 6(0.85,0.65)
  rect 0.7x1.3 smd: EP(0,0)
  silkscreen extent -1.7,-1.3 1.3,1.3, body extent -1.25,-1.25 1.25,1.25, height 1.21
749023310 [mm] "SMT Transformer, body 16.5x10.3mm"
  rect 0.64x1.88 smd: 1(5.5,4.44) 2(4.5,4.44) 3(3.5,4.44) 4(2.5,4.44) 5(1.5,4.44) 6(0.5,4.44) 7(-0.5,4.44) 8(-1.5,4.44) 9(-2.5,4.44) 10(-3.5,4.44) 11(-4.5,4.44) 12(-5.5,4.44) 13(-5.5,-4.44) 14(-4.5,-4.44) 15(-3.5,-4.44) 16(-2.5,-4.44) 17(-1.5,-4.44) 18(-0.5,-4.44) 19(0.5,-4.44) 20(1.5,-4.44) 21(2.5,-4.44) 22(3.5,-4.44) 23(4.5,-4.44) 24(5.5,-4.44)
  silkscreen extent -8.37,-5.27 8.37,5.27, body extent -8.25,-5.15 8.25,5.15, height 4.1
BH-10 [mil]
  rect 64x64 hole 40: 1(-200,-50)
  round 64 hole 40: 2(-200,50) 3(-100,-50) 4(-100,50) 5(0,-50) 6(0,50) 7(100,-50) 8(100,50) 9(200,-50) 10(200,50)
  silkscreen extent -397,-168 391,167, body extent -399,-180 401,178, height 354
CAP0402 [mm]
  rect 0.6x0.6 smd: 1(-0.5,0) 2(0.5,0)
  body extent -0.5,-0.25 0.5,0.25, height 0.49
CAPC0603N [mm] "Chip Capacitor, 2-Leads, Body 1,60x0,85mm, IPC Medium Density"
  rect 0.85x1 smd: 1(-0.675,0) 2(0.675,0)
  Top Layer keep-out region: -0.15,-0.5 0.15,-0.5 0.15,0.5 -0.15,0.5
  body extent -0.85,-0.48 0.85,0.47, height 0.8
CAPC0805N [mm] "Chip Capacitor, 2-Leads, Body 2,00x1,25mm, IPC Medium Density"
  rect 1.15x1.45 smd: 1(-0.875,0) 2(0.875,0)
  body extent -1.07,-0.7 1.07,0.7, height 0.9
CAPC1206(3216)150_L [mm]
  rect 0.95x1.7 smd: 1(-1.4,0) 2(1.4,0)
  silkscreen extent -0.55,-0.75 0.55,0.75, body extent -1.7,-0.9 1.7,0.9, height 1.5
CHOKE_242471_WRE [mm]
  rect 1.443x0.56 smd paste+0 mask+0: 1(-2.284,0.635) 2(-2.284,-0.635) 3(2.284,-0.635) 4(2.284,0.635)
  silkscreen extent -4.43,-1.88 2.63,1.88, body extent -2.71,-1.75 2.71,1.75, height 0.81
EQ144 [mm] "TSQFP, 144-Leads, Body 20,00x20,00mm, Pitch 0,50mm, Thermal Pad 10,00x10,00mm, IPC Medium Density"
  rect 1.45x0.3 smd: 1(-10.725,8.75) 2(-10.725,8.25) 3(-10.725,7.75) 4(-10.725,7.25) 5(-10.725,6.75) 6(-10.725,6.25) 7(-10.725,5.75) 8(-10.725,5.25) 9(-10.725,4.75) 10(-10.725,4.25) 11(-10.725,3.75) 12(-10.725,3.25) 13(-10.725,2.75) 14(-10.725,2.25) 15(-10.725,1.75) 16(-10.725,1.25) 17(-10.725,0.75) 18(-10.725,0.25) 19(-10.725,-0.25) 20(-10.725,-0.75) 21(-10.725,-1.25) 22(-10.725,-1.75) 23(-10.725,-2.25) 24(-10.725,-2.75) 25(-10.725,-3.25) 26(-10.725,-3.75) 27(-10.725,-4.25) 28(-10.725,-4.75) 29(-10.725,-5.25) 30(-10.725,-5.75) 31(-10.725,-6.25) 32(-10.725,-6.75) 33(-10.725,-7.25) 34(-10.725,-7.75) 35(-10.725,-8.25) 36(-10.725,-8.75) 73(10.725,-8.75) 74(10.725,-8.25) 75(10.725,-7.75) 76(10.725,-7.25) 77(10.725,-6.75) 78(10.725,-6.25) 79(10.725,-5.75) 80(10.725,-5.25) 81(10.725,-4.75) 82(10.725,-4.25) 83(10.725,-3.75) 84(10.725,-3.25) 85(10.725,-2.75) 86(10.725,-2.25) 87(10.725,-1.75) 88(10.725,-1.25) 89(10.725,-0.75) 90(10.725,-0.25) 91(10.725,0.25) 92(10.725,0.75) 93(10.725,1.25) 94(10.725,1.75) 95(10.725,2.25) 96(10.725,2.75) 97(10.725,3.25) 98(10.725,3.75) 99(10.725,4.25) 100(10.725,4.75) 101(10.725,5.25) 102(10.725,5.75) 103(10.725,6.25) 104(10.725,6.75) 105(10.725,7.25) 106(10.725,7.75) 107(10.725,8.25) 108(10.725,8.75)
  rect 0.3x1.45 smd: 37(-8.75,-10.725) 38(-8.25,-10.725) 39(-7.75,-10.725) 40(-7.25,-10.725) 41(-6.75,-10.725) 42(-6.25,-10.725) 43(-5.75,-10.725) 44(-5.25,-10.725) 45(-4.75,-10.725) 46(-4.25,-10.725) 47(-3.75,-10.725) 48(-3.25,-10.725) 49(-2.75,-10.725) 50(-2.25,-10.725) 51(-1.75,-10.725) 52(-1.25,-10.725) 53(-0.75,-10.725) 54(-0.25,-10.725) 55(0.25,-10.725) 56(0.75,-10.725) 57(1.25,-10.725) 58(1.75,-10.725) 59(2.25,-10.725) 60(2.75,-10.725) 61(3.25,-10.725) 62(3.75,-10.725) 63(4.25,-10.725) 64(4.75,-10.725) 65(5.25,-10.725) 66(5.75,-10.725) 67(6.25,-10.725) 68(6.75,-10.725) 69(7.25,-10.725) 70(7.75,-10.725) 71(8.25,-10.725) 72(8.75,-10.725) 109(8.75,10.725) 110(8.25,10.725) 111(7.75,10.725) 112(7.25,10.725) 113(6.75,10.725) 114(6.25,10.725) 115(5.75,10.725) 116(5.25,10.725) 117(4.75,10.725) 118(4.25,10.725) 119(3.75,10.725) 120(3.25,10.725) 121(2.75,10.725) 122(2.25,10.725) 123(1.75,10.725) 124(1.25,10.725) 125(0.75,10.725) 126(0.25,10.725) 127(-0.25,10.725) 128(-0.75,10.725) 129(-1.25,10.725) 130(-1.75,10.725) 131(-2.25,10.725) 132(-2.75,10.725) 133(-3.25,10.725) 134(-3.75,10.725) 135(-4.25,10.725) 136(-4.75,10.725) 137(-5.25,10.725) 138(-5.75,10.725) 139(-6.25,10.725) 140(-6.75,10.725) 141(-7.25,10.725) 142(-7.75,10.725) 143(-8.25,10.725) 144(-8.75,10.725)
  rect 10x10 smd: 145(0,0)
  silkscreen extent -11.12,-9.6 9.6,9.92, body extent -10,-10 10,10, height 1.6
LED0805 [mm]
  rect 0.8x1.4 smd: 1(-1.025,0) 2(1.025,0)
  silkscreen extent -1.85,-0.6 0.25,0.6, body extent -1.01,-0.62 1.01,0.63, height 1.1
LFCSP-40 [mm] "QFN, 40-Leads, Body 6x6mm, Pitch 0.5mm, Thermal Pad 4.6x4.6mm, IPC Medium Density"
  rect 0.75x0.25 smd: 1(-3.025,2.25)
  oval 0.75x0.25 smd: 2(-3.025,1.75) 3(-3.025,1.25) 4(-3.025,0.75) 5(-3.025,0.25) 6(-3.025,-0.25) 7(-3.025,-0.75) 8(-3.025,-1.25) 9(-3.025,-1.75) 10(-3.025,-2.25) 21(3.025,-2.25) 22(3.025,-1.75) 23(3.025,-1.25) 24(3.025,-0.75) 25(3.025,-0.25) 26(3.025,0.25) 27(3.025,0.75) 28(3.025,1.25) 29(3.025,1.75) 30(3.025,2.25)
  oval 0.25x0.75 smd: 11(-2.25,-3.025) 12(-1.75,-3.025) 13(-1.25,-3.025) 14(-0.75,-3.025) 15(-0.25,-3.025) 16(0.25,-3.025) 17(0.75,-3.025) 18(1.25,-3.025) 19(1.75,-3.025) 20(2.25,-3.025) 31(2.25,3.025) 32(1.75,3.025) 33(1.25,3.025) 34(0.75,3.025) 35(0.25,3.025) 36(-0.25,3.025) 37(-0.75,3.025) 38(-1.25,3.025) 39(-1.75,3.025) 40(-2.25,3.025)
  rect 2.8x2.8 smd: 41(0,0)
  Top Layer keep-out region: 1.435,-1.656 -1.435,-1.656 -1.435,-1.896 1.435,-1.896
  Top Layer keep-out region: -1.435,1.654 1.435,1.654 1.435,1.894 -1.435,1.894
  silkscreen extent -3.97,-3.2 3.2,3.2, body extent -3.05,-3.05 3.05,3.05, height 0.8
LFCSP-40-01 [mm] "QFN, 40-Leads, Body 6x6mm, Pitch 0.5mm, Thermal Pad 4.6x4.6mm, IPC Medium Density"
  rect 0.75x0.25 smd: 1(-3.025,2.25)
  oval 0.75x0.25 smd: 2(-3.025,1.75) 3(-3.025,1.25) 4(-3.025,0.75) 5(-3.025,0.25) 6(-3.025,-0.25) 7(-3.025,-0.75) 8(-3.025,-1.25) 9(-3.025,-1.75) 10(-3.025,-2.25) 21(3.025,-2.25) 22(3.025,-1.75) 23(3.025,-1.25) 24(3.025,-0.75) 25(3.025,-0.25) 26(3.025,0.25) 27(3.025,0.75) 28(3.025,1.25) 29(3.025,1.75) 30(3.025,2.25)
  oval 0.25x0.75 smd: 11(-2.25,-3.025) 12(-1.75,-3.025) 13(-1.25,-3.025) 14(-0.75,-3.025) 15(-0.25,-3.025) 16(0.25,-3.025) 17(0.75,-3.025) 18(1.25,-3.025) 19(1.75,-3.025) 20(2.25,-3.025) 31(2.25,3.025) 32(1.75,3.025) 33(1.25,3.025) 34(0.75,3.025) 35(0.25,3.025) 36(-0.25,3.025) 37(-0.75,3.025) 38(-1.25,3.025) 39(-1.75,3.025) 40(-2.25,3.025)
  rect 3.5x3.5 smd: 41(0,0)
  silkscreen extent -3.97,-3.2 3.2,3.2, body extent -3.05,-3.05 3.05,3.05, height 0.8
PBD16 [mm]
  rect 1.6x1.6 hole 1: 1(-8.83,-1.27)
  round 1.6 hole 1: 2(-8.83,1.27) 3(-6.29,-1.27) 4(-6.29,1.27) 5(-3.75,-1.27) 6(-3.75,1.27) 7(-1.21,-1.27) 8(-1.21,1.27) 9(1.33,-1.27) 10(1.33,1.27) 11(3.87,-1.27) 12(3.87,1.27) 13(6.41,-1.27) 14(6.41,1.27) 15(8.95,-1.27) 16(8.95,1.27)
  silkscreen extent -10.3,-2.5 10.5,2.5, body extent -10.31,-2.5 10.51,2.5, height 8.51
PLD_6 [mm]
  round 1.8 hole 1: 1(0,0) 2(0,-2.54) 3(2.54,0) 4(2.54,-2.54) 5(5.08,0) 6(5.08,-2.54)
  silkscreen extent -1.27,-3.81 6.35,1.27
PLS1 [mm]
  round 2 hole 1: 1(0,0)
  silkscreen extent -1.27,-1.27 1.27,1.27
RESC0402(1005)_M [mm] "Chip Resistor, Body 1.0x0.5mm, IPC Low Density"
  rect 0.65x0.75 smd: 1(-0.55,0) 2(0.55,0)
  body extent -0.52,-0.28 0.53,0.28, height 0.4
RESC0603N [mm] "Chip Resistor, 2-Leads, Body 1,60x0,85mm, IPC Medium Density"
  rect 0.8x0.95 smd: 1(-0.65,0) 2(0.65,0)
  silkscreen extent 0,-0.5 0,0.5, body extent -0.85,-0.48 0.85,0.48, height 0.5
RESC0805L [mm] "Chip Resistor, 2-Leads, Body 2,00x1,25mm, IPC High Density"
  rect 0.95x1.25 smd: 1(-0.85,0) 2(0.85,0)
  silkscreen extent 0,-0.75 0,0.75, body extent -1.1,-0.67 1.1,0.67, height 0.7
RJ-45_5406299-1 [mm]
  round 1.47 hole 0.97: 1(-4.445,6.35) 2(-3.175,8.89) 3(-1.905,6.35) 4(-0.635,8.89) 5(0.635,6.35) 6(1.905,8.89) 7(3.175,6.35) 8(4.445,8.89)
  round 4 hole 3.33: 9(5.715,0) 10(-5.715,0)
  round 2.5 hole 1.65: 11(7.745,3.05) 12(-7.745,3.05)
  silkscreen extent -8.89,-10.67 8.89,10.67, body extent -8.87,-10.75 8.87,10.58, height 14.75
SO-8 [mm]
  rect 2.2x0.6 smd: 1(-2.6,1.905) 2(-2.6,0.635) 3(-2.6,-0.635) 4(-2.6,-1.905) 5(2.6,-1.905) 6(2.6,-0.635) 7(2.6,0.635) 8(2.6,1.905)
  silkscreen extent -2.94,2.64 -2.54,3.04, body extent -3,-2.45 3,2.45, height 1.75
TP-ROUND-TOP-1.5 [mm]
  round 1.5 smd: 1(0,0)
TSX-3225_V [mm] "SMD, 4-Leads, Body 3.2x2.5mm"
  rect 1.4x1.15 smd: 1(-1.1,-0.8) 2(1.1,-0.8) 3(1.1,0.8) 4(-1.1,0.8)
  silkscreen extent -2.25,-1.75 -2.15,-1.65, body extent -1.6,-1.25 1.6,1.25, height 0.6
U-DFN3810-9 [mm]
  rect 0.2x0.7 smd: 1(-1.7,-0.5) 2(-0.8,-0.5) 3(0,-0.5) 4(0.8,-0.5) 5(1.7,-0.5) 6(1.3,0.5) 7(0.4,0.5) 8(-0.4,0.5) 9(-1.3,0.5)
  silkscreen extent -2.38,-1.38 2.16,0.51, body extent -1.92,-0.53 1.92,0.53, height 0.55
X_XH-2A_2.5 [mm]
  rect 2x2 hole 1: 1(0,0)
  round 2 hole 1: 2(2.5,0)
  silkscreen extent -2.7,-3 5.3,3, body extent -2.7,-3 5.3,3, height 7

## Part data
C1 C2 C21 C23 C25 C44 C45 C62: library part CAPC, Package=CAPC0603N, Voltage=25V, BOMDescription="SMD CHIP CERAMIC CAPACITOR CAPC0603N 10uF  25V", CFootprint=CAPC0603N, ClassName=Capacitor, ComponentLink1Description=Datasheet, MntType=SMD, MSL="MSL 1", Part Number=CAPC, PartType="CHIP CERAMIC CAPACITOR", Pins=2, RoHS=Comply
  C62: BOMDescriptionRUS=пїЅпїЅпїЅпїЅпїЅпїЅпїЅпїЅпїЅпїЅпїЅ, ID=83, PartTypeRUS=пїЅпїЅпїЅпїЅпїЅпїЅпїЅпїЅпїЅпїЅпїЅ
C3 C5 C6 C7 C8 C9 C10 C11 C12 C13 C14 C15 C16 C17 C18 C19 C20 C22 C24 C26 C27 C29 C30 C31 C32 C33 C34 C35 C38 C39 C40 C41 C42 C43 C46 C48 C49 C50 C51 C52 C53 C54 C55 C65: library part CAP0402, Voltage=50V, CFootprint=CAP0402, ClassName=Capacitor, ComponentLink1Description=Datasheet, MntType=SMD, MSL="MSL 1", Package=CAP0402, Part Number=CAP0402, PartType="CHIP CERAMIC CAPACITOR", Pins=2, RoHS=Comply
  C3 C46 C65: BOMDescription="SMD CHIP CERAMIC CAPACITOR CAP0402 22pF  50V"
  C5 C6 C7 C8 C9 C10 C11 C12 C13 C14 C15 C16 C18 C19 C20 C22 C24 C26: BOMDescription="SMD CHIP CERAMIC CAPACITOR CAP0402 100 nF  50V"
  C17 C29 C30 C31 C32 C33 C34 C38 C40 C42 C48 C50 C52 C54: BOMDescription="SMD CHIP CERAMIC CAPACITOR CAP0402 100nF  50V"
  C27 C35 C39 C41 C43 C49 C51 C53 C55: BOMDescription="SMD CHIP CERAMIC CAPACITOR CAP0402 10nF  50V"
C4 C56 C57 C60 C61 C64 C66 C67 C68 C69 C70 C71 C72 C73 C74 C75: library part CAP0402, BOMDescriptionRUS=пїЅпїЅпїЅпїЅпїЅпїЅпїЅпїЅпїЅпїЅпїЅ, CFootprint=CAP0402, ClassName=Capacitor, ComponentLink1Description=Datasheet, ID=82, MntType=SMD, MSL="MSL 1", Package=CAP0402, Part Number=CAP0402, PartType="CHIP CERAMIC CAPACITOR", PartTypeRUS=пїЅпїЅпїЅпїЅпїЅпїЅпїЅпїЅпїЅпїЅпїЅ, Pins=2, RoHS=Comply
  C4: BOMDescription="SMD CHIP CERAMIC CAPACITOR CAP0402 100 nF  *"
  C56 C57: BOMDescription="SMD CHIP CERAMIC CAPACITOR CAP0402 220nF  *"
  C60: BOMDescription="SMD CHIP CERAMIC CAPACITOR CAP0402 1uF  *"
  C61: BOMDescription="SMD CHIP CERAMIC CAPACITOR CAP0402 0,1uF  *"
  C64 C66 C68 C70 C72 C74: BOMDescription="SMD CHIP CERAMIC CAPACITOR CAP0402 100nF  *"
  C67 C69 C71 C73: BOMDescription="SMD CHIP CERAMIC CAPACITOR CAP0402 10nF  *"
  C75: BOMDescription="SMD CHIP CERAMIC CAPACITOR CAP0402 680nF  *"
C28: library part CAPC, Package=CAPC1206(3216)150_L, Voltage="2 kV", BOMDescription="SMD CHIP CERAMIC CAPACITOR CAPC1206(3216)150_L 2,2 nF  2 kV", CFootprint=CAPC1206(3216)150_L, ClassName=Capacitor, ComponentLink1Description=Datasheet, MntType=SMD, MSL="MSL 1", Part Number=CAPC, PartType="CHIP CERAMIC CAPACITOR", Pins=2, RoHS=Comply
C36 C37 C47: library part CAP0402, Voltage=25V, BOMDescription="SMD CHIP CERAMIC CAPACITOR CAP0402 1uF  25V", CFootprint=CAP0402, ClassName=Capacitor, ComponentLink1Description=Datasheet, MntType=SMD, MSL="MSL 1", Package=CAP0402, Part Number=CAP0402, PartType="CHIP CERAMIC CAPACITOR", Pins=2, RoHS=Comply
C58 C59: library part CAPC, Package=CAPC0805N, Voltage=1kV, BOMDescription="SMD CHIP CERAMIC CAPACITOR CAPC0805N 100 nF  1kV", BOMDescriptionRUS=пїЅпїЅпїЅпїЅпїЅпїЅпїЅпїЅпїЅпїЅпїЅ, CFootprint=CAPC0805N, ClassName=Capacitor, ComponentLink1Description=Datasheet, ID=83, MntType=SMD, MSL="MSL 1", Part Number=CAPC, PartType="CHIP CERAMIC CAPACITOR", PartTypeRUS=пїЅпїЅпїЅпїЅпїЅпїЅпїЅпїЅпїЅпїЅпїЅ, Pins=2, RoHS=Comply
C63: library part CAPC, Package=CAPC0603N, BOMDescription="SMD CHIP CERAMIC CAPACITOR CAPC0603N 10uF  *", BOMDescriptionRUS=пїЅпїЅпїЅпїЅпїЅпїЅпїЅпїЅпїЅпїЅпїЅ, CFootprint=CAPC0603N, ClassName=Capacitor, ComponentLink1Description=Datasheet, ID=83, MntType=SMD, MSL="MSL 1", Part Number=CAPC, PartType="CHIP CERAMIC CAPACITOR", PartTypeRUS=пїЅпїЅпїЅпїЅпїЅпїЅпїЅпїЅпїЅпїЅпїЅ, Pins=2, RoHS=Comply
DD1: library part GW2A-LV18EQ144C8/I7, Manufacturer=GoWin, Package=EQ144, BOMDescription=GW2A-LV18EQ144C8/I7, BOMDescriptionRUS="пїЅпїЅпїЅпїЅпїЅпїЅпїЅпїЅпїЅпїЅ GW2A-LV18EQ144C8/I7", CFootprint=EQ144, ClassName=FPGA, ComponentLink1Description=Datasheet, ComponentLink1URL=https://gowinsemi.com/en/support/database/?support_search=DS102, ID=149, MntType=SMD, MPN=GW2A-LV18EQ144C8/I7, MSL="MSL 1", Part Number=GW2A-LV18EQ144C8/I7, PartType=FPGA, PartTypeRUS=пїЅпїЅпїЅпїЅпїЅпїЅпїЅпїЅпїЅпїЅ, Pins=144, RoHS=Comply
DD2 DD8 DD10: library part 171010550, Manufacturer=WE, Package=LGA-6EP, BOMDescription=171010550, CFootprint=171010550, ClassName=Buck, ComponentLink1Description=Datasheet, ComponentLink1URL=https://www.we-online.com/catalog/datasheet/171010550_valid_from_2021-12-01.pdf, MntType=SMD, MPN=171010550, MSL="MSL 1", Part Number=171010550, PartType="Buck converter", Pins=8, RoHS=Comply
DD3 DD7 DD11: library part OT322525MJBA4SL, Manufacturer="Yangxing Tech", Package=SMD3225, BOMDescription=OT322525MJBA4SL, CFootprint=TSX-3225_V, ClassName=Oscillator, ComponentLink1Description=Datasheet, ComponentLink1URL=https://datasheet.lcsc.com/lcsc/2103291238_Yangxing-Tech-OT322525MJBA4SL_C669088.pdf, MntType=SMD, MPN=OT322525MJBA4SL, MSL="MSL 1", Part Number=OT322525MJBA4SL, PartType=Oscillator, Pins=4, RoHS=Comply
DD4: library part W25Q128JVSIM, Manufacturer=WINBOND, Package=SO-8, BOMDescription=W25Q128JVSIM, CFootprint=SO-8, ClassName=Flash, ComponentLink1Description=Datasheet, ComponentLink1URL=https://www.winbond.com/resource-files/w25q128jv_dtr%20revc%2003272018%20plus.pdf, MntType=SMD, MPN=W25Q128JVSIM, MSL="MSL 1", Part Number=W25Q128JVSIM, PartType=Flash, Pins=8, RoHS=Comply
DD5: library part D3V3X8U9LP3810, Manufacturer=DiodesInc, Package=U-DFN3810-9, BOMDescription=D3V3X8U9LP3810, CFootprint=U-DFN3810-9, ClassName=TVS, ComponentLink1Description=Datasheet, ComponentLink1URL=https://www.diodes.com/assets/Datasheets/D3V3X8U9LP3810.pdf, MntType=SMD, MPN=D3V3X8U9LP3810, MSL="MSL 1", Part Number=D3V3X8U9LP3810, PartType=TVS, Pins=9, RoHS=Comply
DD6: library part ADIN1300BCPZ, Manufacturer=AD, Package=LFCSP-40, BOMDescription=ADIN1300BCPZ, BOMDescriptionRUS="пїЅпїЅпїЅпїЅпїЅпїЅпїЅпїЅпїЅпїЅ ADIN1300BCPZ", CFootprint=LFCSP-40, ClassName="Ethernet Phy", ComponentLink1Description=Datasheet, ComponentLink1URL=https://www.analog.com/media/en/technical-documentation/data-sheets/ADIN1300.pdf, ID=46, MntType=SMD, MPN=ADIN1300BCPZ, MSL="MSL 1", Part Number=ADIN1300BCPZ, PartType="Ethernet Phy", PartTypeRUS=пїЅпїЅпїЅпїЅпїЅпїЅпїЅпїЅпїЅпїЅ, Pins=41, RoHS=Comply
DD9: library part ADIN1100BCPZ, Manufacturer=AD, Package=LFCSP-40-01, BOMDescription=ADIN1100BCPZ, BOMDescriptionRUS="пїЅпїЅпїЅпїЅпїЅпїЅпїЅпїЅпїЅпїЅ ADIN1100BCPZ", CFootprint=LFCSP-40-01, ClassName="SPE Phy", ComponentLink1Description=Datasheet, ComponentLink1URL=https://www.analog.com/media/en/technical-documentation/data-sheets/adin1100.pdf, ID=430, MntType=SMD, MPN=ADIN1100BCPZ, MSL="MSL 1", Part Number=ADIN1100BCPZ, PartType="SPE Phy", PartTypeRUS=пїЅпїЅпїЅпїЅпїЅпїЅпїЅпїЅпїЅпїЅ, Pins=41, RoHS=Comply
L1 L2 L3: library part BLM18KG221SN1D, Manufacturer=Murata, Package=CAPC0603N, BOMDescription="SMD Ferrite Beads CAPC0603N     BLM18KG221SN1D", CFootprint=CAPC0603N, ClassName="Ferrite Beads", ComponentLink1Description=Datasheet, ComponentLink1URL=https://ru.mouser.com/datasheet/2/281/ENFA0003-1915778.pdf, MntType=SMD, MPN=BLM18KG221SN1D, MSL="MSL 1", Part Number=BLM18KG221SN1D, PartType="Ferrite Beads", Pins=2, RoHS=Comply
L4: library part 744242471, "SMD Common Mode Choke 350 uH"
LED1 LED2 LED3: library part LEDC0805, Package=LED0805, BOMDescription="SMD CHIP LED LED0805 Green", BOMDescriptionRUS=пїЅпїЅпїЅпїЅпїЅпїЅпїЅпїЅпїЅ, CFootprint=LED0805, ClassName=LED, ComponentLink1Description=Datasheet, ID=197, MntType=SMD, MSL="MSL 5", Part Number=LEDC0805, PartType="CHIP LED", PartTypeRUS=пїЅпїЅпїЅпїЅпїЅпїЅпїЅпїЅпїЅ, Pins=2, RoHS=Comply
R1 R2 R3 R4 R5 R6 R7 R8 R9 R10 R11 R12 R13 R14 R15 R16 R18 R20 R23 R24 R26 R27 R28 R29 R30 R32 R33 R34 R35 R36 R37 R38 R39 R40 R41 R42 R44 R45 R46 R47 R48 R49 R50 R51: library part RES0402, Package=RESC0402(1005)_M, CFootprint=RESC0402(1005)_M, ClassName=Resistor, ComponentLink1Description=Datasheet, MntType=SMD, MSL="MSL 1", Part Number=RES0402, PartType="CHIP RESISTOR", Pins=2, RoHS=Comply
  R1 R30 R49: BOMDescription="SMD CHIP RESISTOR RESC0402(1005)_M 100kOhm"
  R2: BOMDescription="SMD CHIP RESISTOR RESC0402(1005)_M 390kOhm"
  R3 R4 R5 R6 R34 R36 R39 R41: BOMDescription="SMD CHIP RESISTOR RESC0402(1005)_M 10kOhm", BOMDescriptionRUS=пїЅпїЅпїЅпїЅпїЅпїЅпїЅпїЅ, ID=301, PartTypeRUS=пїЅпїЅпїЅпїЅпїЅпїЅпїЅпїЅ
  R7 R8 R9 R45 R46 R47 R48: BOMDescription="SMD CHIP RESISTOR RESC0402(1005)_M 4,7kOhm", BOMDescriptionRUS=пїЅпїЅпїЅпїЅпїЅпїЅпїЅпїЅ, ID=301, PartTypeRUS=пїЅпїЅпїЅпїЅпїЅпїЅпїЅпїЅ
  R10 R18 R23 R27 R28 R29 R50: BOMDescription="SMD CHIP RESISTOR RESC0402(1005)_M 10kohm"
  R11: BOMDescription="SMD CHIP RESISTOR RESC0402(1005)_M 10 kOhm"
  R12 R13: BOMDescription="SMD CHIP RESISTOR RESC0402(1005)_M 4,7 kOhm"
  R14 R15 R16: BOMDescription="SMD CHIP RESISTOR RESC0402(1005)_M 1.5kohm"
  R20: BOMDescription="SMD CHIP RESISTOR RESC0402(1005)_M 0 ohm"
  R24 R26: BOMDescription="SMD CHIP RESISTOR RESC0402(1005)_M 56kohm"
  R32 R40: BOMDescription="SMD CHIP RESISTOR RESC0402(1005)_M 49,9Ohm", BOMDescriptionRUS=пїЅпїЅпїЅпїЅпїЅпїЅпїЅпїЅ, ID=301, PartTypeRUS=пїЅпїЅпїЅпїЅпїЅпїЅпїЅпїЅ
  R33 R38: BOMDescription="SMD CHIP RESISTOR RESC0402(1005)_M 10,2kOhm", BOMDescriptionRUS=пїЅпїЅпїЅпїЅпїЅпїЅпїЅпїЅ, ID=301, PartTypeRUS=пїЅпїЅпїЅпїЅпїЅпїЅпїЅпїЅ
  R35 R37: BOMDescription="SMD CHIP RESISTOR RESC0402(1005)_M 5,1kOhm", BOMDescriptionRUS=пїЅпїЅпїЅпїЅпїЅпїЅпїЅпїЅ, ID=301, PartTypeRUS=пїЅпїЅпїЅпїЅпїЅпїЅпїЅпїЅ
  R42 R44: BOMDescription="SMD CHIP RESISTOR RESC0402(1005)_M 1.5kOhm"
  R51: BOMDescription="SMD CHIP RESISTOR RESC0402(1005)_M 270kOhm"
R17 R19 R21 R25: library part RES, Package=RESC0603N, BOMDescription="SMD CHIP RESISTOR RESC0603N 75 Ohm", CFootprint=RESC0603N, ClassName=Resistor, ComponentLink1Description=Datasheet, MntType=SMD, MSL="MSL 1", Part Number=RES, PartType="CHIP RESISTOR", Pins=2, RoHS=Comply
R22: library part RES0402, Package=RESC0402(1005)_M, Tolerance=1%, BOMDescription="SMD CHIP RESISTOR RESC0402(1005)_M 3.01kohm 1%", CFootprint=RESC0402(1005)_M, ClassName=Resistor, ComponentLink1Description=Datasheet, MntType=SMD, MSL="MSL 1", Part Number=RES0402, PartType="CHIP RESISTOR", Pins=2, RoHS=Comply
R31 R43: library part RES, Package=RESC0805L, BOMDescriptionRUS=пїЅпїЅпїЅпїЅпїЅпїЅпїЅпїЅ, CFootprint=RESC0805L, ClassName=Resistor, ComponentLink1Description=Datasheet, ID=300, MntType=SMD, MSL="MSL 1", Part Number=RES, PartType="CHIP RESISTOR", PartTypeRUS=пїЅпїЅпїЅпїЅпїЅпїЅпїЅпїЅ, Pins=2, RoHS=Comply
  R31: BOMDescription="SMD CHIP RESISTOR RESC0805L 787 kOhm"
  R43: BOMDescription="SMD CHIP RESISTOR RESC0805L 4,7kOhm"
T1: library part 749023310, "WE-LAN AQ SMT Transformer, 1000 Base-T, PoE (up to 350 mA), 180uH", Manufacturer=WE, BOMDescription=749023310, CFootprint=749023310, ClassName=Transformer, ComponentLink1Description=Datasheet, ComponentLink1URL=https://www.we-online.com/catalog/datasheet/749023310.pdf, MntType=SMD, MPN=749023310, MSL="MSL 1", Part Number=749023310, PartType=Transformer, RoHS=Comply
X1: library part Connector_16pin, BOMDescription="DIP CONNECTOR  Value", BOMDescriptionRUS=пїЅпїЅпїЅпїЅпїЅпїЅ, CFootprint=PBD16, ClassName=Connector, ComponentLink1Description=Datasheet, ID=101, MntType=DIP, MSL="MSL 1", Part Number=Connector_16pin, PartType=CONNECTOR, PartTypeRUS=пїЅпїЅпїЅпїЅпїЅпїЅ, Pins=16, RoHS=Comply, System=Connector
X5: Manufacturer=TE, Package=RJ45, BOMDescription=5406299-1, CFootprint=RJ-45_5406299-1, ClassName=Connector, ComponentLink1Description=Datasheet, ComponentLink1URL=https://www.te.com/commerce/DocumentDelivery/DDEController?Action=srchrtrv&DocNm=5406299&DocType=Customer+Drawing&DocLang=English&PartCntxt=5406299-1&DocFormat=pdf, MntType=DIP, MPN=5406299-1, MSL="MSL 1", Part Number=5406299-1, PartType=CONNECTOR, Pins=12, RoHS=Comply, System=Connector
X6: library part Test_PLS1, BOMDescription="DIP PLS", CFootprint=PLS1, ClassName=Test_Point, ComponentLink1Description=Datasheet, MntType=DIP, MSL="MSL 1", Part Number=Test_PLS1, PartType=PLS, Pins=1, RoHS=Comply, System=Connector
TP1 TP2: BOMDescription=SMD, CFootprint=TP-ROUND-TOP-1.5, ClassName=Touch, ComponentLink1Description=Datasheet, MntType=SMD, MSL="MSL 1", Part Number=TP-SINGLE-ROUND, RoHS=Comply
X2 X4: BOMDescription=PLD-6, CFootprint=PLD_6, ClassName=Connector, ComponentLink1Description=Datasheet, MntType=DIP, MPN=PLD-6, MSL="MSL 1", Part Number=PLD-6, PartType=CONNECTOR, Pins=6, RoHS=Comply, System=Connector, Wire1=WIRE_1, Wire2=WIRE_2, Wire3=WIRE_3, Wire4=WIRE_4, Wire5=WIRE_5, Wire6=WIRE_6, Wire7=WIRE_7, Wire8=WIRE_8
X3: BOMDescription="DIP CONNECTOR BH-10 Value    BH-10", BOMDescriptionRUS="пїЅпїЅпїЅпїЅпїЅпїЅ BH-10", CFootprint=BH-10, ClassName=Connector, ComponentLink1Description=Datasheet, ID=68, MntType=DIP, MPN=BH-10, MSL="MSL 1", Package=BH-10, Part Number=BH-10, PartType=CONNECTOR, PartTypeRUS=пїЅпїЅпїЅпїЅпїЅпїЅ, Pins=10, RoHS=Comply, System=Connector
X7: BOMDescription="DIP CONNECTOR  XH-2A    XH-2A", BOMDescriptionRUS="пїЅпїЅпїЅпїЅпїЅпїЅ XH-2A", CFootprint=X_XH-2A_2.5, ClassName=Connector, ComponentLink1Description=Datasheet, ComponentLink1URL=https://datasheet.lcsc.com/szlcsc/1811132110_BOOMELE-Boom-Precision-Elec-XH-2A_C20079.pdf, ID=410, MntType=DIP, MPN=XH-2A, MSL="MSL 1", Part Number=XH-2A, PartType=CONNECTOR, PartTypeRUS=пїЅпїЅпїЅпїЅпїЅпїЅ, Pins=2, RoHS=Comply, System=Connector, Wire1=DATA-, Wire2=DATA+

## Free pads (board coordinates)
  round 5 hole 3.2: 2(29.2,123.4) 3(173.9,123.4) 4(174.398,29.176) 5(29.098,29.076)

## Via types
v1: diameter 0.6, hole 0.3, Top Layer to Bottom Layer, tented both sides, 207 vias
v2: diameter 0.7, hole 0.3, Top Layer to Bottom Layer, tented both sides, 25 vias

## Nets (pads, with @x,y where several pads share a name; then routed paths per layer and width w, separated by ;. In a path a pad name is that pad's centre, name@x,y a point inside that pad or via, vN(x,y) a via of type N, cw(c..) or ccw(c..) an arc to the next point about the centre after c; other vN are vias at no path point)
+0V9: C44.2 C46.1 C47.2 C48.2 C49.2 C50.2 C51.2 C52.2 C53.2 DD6.4 DD6.28 DD6.36 DD8.6 R30.1 | length 28.2
  Top Layer w0.3: v1(130.3,52.9) 131.036,52.9 131.061,52.875 DD6.36@131.325,52.875 ; R30.1@132.4,44.45 133.55,44.45 C46.1@133.6,44.4 ; DD6.28@133.1,56.15 v1(133.1,57) ; DD6.4@133.6,50.1 v1(133.6,49.3) C46.1@133.6,44.4 ; DD8.6@135.25,42.05 135.325,42.125 C44.2@135.325,44.1 135.325,44.175 135,44.5 133.7,44.5 C46.1@133.6,44.4
  Bottom Layer w0.3: C53.2@129.5,52.1 C52.2@129.5,53 ; C50.2@133.1,58.7 C51.2@133.1,57.8 v1(133.1,57) 133.1,55.351 132.924,55.175 130.526,55.175 129.7,54.349 129.7,53.326 129.65,53.276 129.65,53.15 C52.2@129.5,53 ; v1(133.6,49.3) 133.526,49.374 133.526,49.674 v1(130.3,52.9) 129.6,52.9 C52.2@129.5,53
+1V0: C1.2 C3.1 DD2.6 L1.1 L2.1 L3.1 R1.1 | length 59.3
  Top Layer w0.3: L2.1@93.2,111.475 94.616,111.475 95.195,112.054 95.195,112.124 95.371,112.3 100.2,112.3 100.6,111.9 v1(105.4,111.9) ; L1.1@95.6,77.725 96.875,77.725 v1(96.9,77.7) ; DD2.6@105.35,114.65 105.35,113.125 C1.2@105.375,113.1 ; L3.1@105.4,110.85 v1(105.4,111.9) ; R1.1@108.4,112.05 108.35,112.1 C3.1@107.2,112.1 107.05,112.25 106.75,112.25 106.074,112.926 105.549,112.926 C1.2@105.375,113.1 ; C1.2@105.375,113.1 105.4,113.075 v1(105.4,111.9)
  Bottom Layer w0.3: v1(96.9,77.7) 96.9,79.8 105.7,88.6 105.7,111.574 105.4,111.874 v1(105.4,111.9)
+1V1: C63.2 C65.1 C74.2 DD9.24 DD10.6 R49.1 | length 12.6
  Top Layer w0.3: DD9.24@50.275,74.925 C74.2@53.875,74.925 ; C74.2@54,74.8 54.2,74.6 54.583,74.6 54.7,74.483 54.7,73.125 55.25,72.575 55.25,72.5 55.525,72.225 C63.2@55.6,72.225 ; R49.1@55.35,69.2 55.35,70.55 C65.1@55.4,70.6 55.6,70.8 C63.2@55.6,72.225 ; DD10.6@57.85,72.05 57.85,72.125 57.75,72.225 C63.2@55.6,72.225
+3V3: C2.2 C5.2 C6.2 C7.2 C8.2 C9.2 C10.2 C11.2 C12.2 C13.2 C14.2 C15.2 C16.2 C17.2 C18.2 C19.2 C20.2 C33.2 C34.2 C35.2 C36.2 C37.2 C38.2 C39.2 C40.2 C41.2 C42.2 C43.2 C45.2 C54.2 C55.2 C62.2 C64.2 C66.2 C67.2 C68.2 C69.2 C70.2 C71.2 C72.2 C73.2 DD1.1 DD1.5 DD1.19 DD1.31 DD1.36 DD1.37 DD1.55 DD1.73 DD1.77 DD1.91 DD1.103 DD1.108 DD1.109 DD1.127 DD2.3 DD2.4 DD3.4 DD4.8 DD6.11 DD6.20 DD6.25 DD6.31 DD6.40 DD7.4 DD8.3 DD8.4 DD9.16 DD9.17 DD9.22 DD9.35 DD10.3 DD10.4 DD11.4 R4.2 R10.1 R12.1 R13.2 R14.2 R15.1 R16.1 R18.2 R20.2 R23.2 R24.2 R29.1 R36.2 R41.2 R42.1 R43.2 R44.1 R50.1 X1.15 X1.16 X2.1 X2.2 X2.3 X2.4 X2.5 X2.6 X3.6 | length 123.2
  Top Layer w0.2: v1(35.4,74.3) 35.508,74.3 35.608,74.2 C64.2@36.3,74.2 36.35,74.25 R50.1@37.5,74.25 37.55,74.25 37.775,74.475 37.775,74.483 37.892,74.6 DD11.4@39.1,74.6 ; v1(39.4,79.8) 39.4,78.45 R43.2@39.45,78.4 ; v1(47.1,69.9) C68.2@48,69.9 C69.2@48,70.8 48,71.5 47.5,72 DD9.16@47.5,72.65 ; DD9.35@47.5,78.7 47.5,78.964 47.625,79.089 47.625,79.105 48.15,79.63 48.15,80.35 C66.2@48.6,80.8 C67.2@48.6,81.7 v1(48.6,82.5) ; DD9.17@48,72.65 48,72.386 48.125,72.261 48.125,72.245 48.646,71.724 49.029,71.724 49.55,71.204 49.55,68.972 49.2,68.622 49.2,68.6 C70.2@49,68.4 C71.2@49,67.5 v1(49,66.7) ; R41.2@50.2,83.35 v1(50.2,84.45) ; DD9.22@50.275,73.925 50.539,73.925 50.664,73.8 50.68,73.8 51.1,73.38 51.1,72.3 51.6,71.8 C72.2@52.1,71.8 C73.2@52.1,71 ; v1(52.1,69.6) C73.2@52.1,70.8 ; R36.2@52.35,80.3 v1(53.45,80.3) ; v1(59.1,67.4) C62.2@59.1,69 59.15,69.05 DD10.3@59.15,70.35 ; DD10.4@59.15,72.05 59.25,72.15 59.25,72.95 v1(59.2,73) ; v1(61.2,79.1) 61.25,79.05 R44.1@62.8,79.05 ; v1(62.4,76.4) R42.1@63.25,76.4 ; v1(79.6,98.6) C17.2@79.6,97.6 80.95,97.6 81.125,97.775 81.125,97.825 81.35,98.05 R10.1@81.4,98.05 82.75,98.05 DD3.4@83,98.3 ; DD3.4@82.875,98.6 DD3.4@83,98.6 ; C5.2@84.8,93.3 v1(86.1,93.3) 87.878,93.3 88.428,93.85 DD1.127@90.075,93.85 ; C6.2@86.3,102.9 v1(87.3,102.9) 87.35,102.85 DD1.109@90.075,102.85 ; C19.2@89.2,105.8 89.3,105.7 v1(90.6,105.7) 91.475,104.825 DD1.108@92.05,104.825 ; C15.2@91.9,80.9 91.8,81 v1(91.8,82.2) 91.8,82.308 92.009,82.517 92.009,83.334 DD1.1@92.05,83.375 ; C11.2@94,81 94.05,81.05 v1(94.05,81.95) DD1.5@94.05,83.375 ; C14.2@94.5,107.1 94.5,106.2 v1(94.55,106.15) DD1.103@94.55,104.825 ; R12.1@97.1,119.65 v1(97.1,121) ; DD4.8@99.605,110.9 99.605,109.445 99.975,109.075 100.025,109.075 100.25,108.85 R13.2@100.25,108.8 C20.2@101.3,108.8 v1(101.3,109.7) ; C8.2@100.5,107.2 v1(100.5,106.2) 100.55,106.15 DD1.91@100.55,104.825 ; DD1.19@101.05,83.375 101.1,83.325 101.1,82.6 101.15,82.55 101.15,82.546 101.296,82.4 101.3,82.4 v1(101.85,81.85) 101.85,80.85 C12.2@101.9,80.8 ; v1(104.3,116.2) 104.317,116.2 104.617,115.9 105.3,115.9 DD2.4@105.35,115.95 ; DD1.31@107.05,83.375 107,83.325 v1(107,82.1) 107,81.4 C13.2@107.2,81.2 ; DD2.3@107.1,115.9 DD2.3@107.05,115.95 107.125,116.025 C2.2@108.3,116.025 108.325,116 v1(109.7,116) ; C7.2@107.5,107.4 v1(107.5,106.6) 107.5,104.875 DD1.77@107.55,104.825 ; DD1.36@109.55,83.375 109.55,82.963 109.6,82.913 109.883,82.913 v1(110.282,82.513) ; DD1.73@109.55,104.825 109.55,105.108 109.6,105.158 109.883,105.158 110.3,105.575 v1(110.3,106.1) C18.2@110.3,106.9 ; v1@110.3,82.534 111.066,82.534 C16.2@111.1,82.5 ; DD1.37@111.525,85.35 111.808,85.35 111.858,85.3 111.858,85.017 111.93,84.945 111.93,84.706 v1(112.007,84.629) ; DD1.55@111.525,94.35 112.55,94.35 v1(112.9,94.7) C9.2@114,94.7 ; C10.2@112,83.7 112.025,83.725 v1@112.025,84.629 ; v1(126.3,97) R4.2@127.3,97 ; v1(128.3,50.8) C55.2@129.2,50.8 C54.2@130.2,50.8 130.275,50.875 DD6.40@131.325,50.875 ; v1(130.521,55.775) 130.625,55.775 131.015,55.385 131.315,55.385 DD6.31@131.325,55.375 ; v1(132.6,40.7) 132.65,40.75 DD8.3@133.55,40.75 ; DD6.25@134.6,56.15 v1(134.6,57) ; DD8.4@135.25,40.75 135.325,40.675 C45.2@136.6,40.675 136.675,40.6 v1(138,40.6) ; DD6.11@137.375,50.875 138.575,50.875 C40.2@138.6,50.9 C41.2@139.6,50.9 v1(140.5,50.9) ; DD6.20@137.375,55.375 138.375,55.375 C37.2@138.6,55.6 C38.2@139.5,55.6 140.9,55.6 v1(141.3,56) ; R24.2@140.05,62.2 v1(141.1,62.2) ; DD7.4@140.1,45.3 140.5,44.9 v1(140.5,41.5) ; v1(143.3,62.1) R20.2@143.3,63.35
  Bottom Layer w0.2: C43.2@127.4,55.5 C42.2@128.5,55.5 129.8,55.5 130.073,55.774 130.519,55.774 v1(130.521,55.775) ; v1(131.3,63.2) 131.3,62.45 131.475,62.275 131.525,62.275 131.75,62.05 R15.1@131.75,62 ; v1(134.6,57) C34.2@134.6,57.7 ; C34.2@134.6,57.8 C35.2@134.6,58.7 C36.2@134.6,59.6 ; R16.1@135.7,66.25 v1(135.7,67.4) ; v1(136,46) R18.2@136,46.85 ; R23.2@137,59.55 R23.2@137.2,59.35 v1(137.2,60.3) ; R14.2@138.35,67.7 v1(139.5,67.7)
ADC_Feedback_2: DD1.59 R5.1 | length 20.6
  Top Layer w0.2: DD1.59@111.525,96.35 119.51,96.35 122.185,93.675 130.079,93.675 130.429,94.025 130.525,94.025 130.75,94.25 R5.1@130.75,94.3
ADC_Vref_2: DD1.61 R4.1 R6.2 | length 18.8
  Top Layer w0.2: DD1.61@111.525,97.35 119.5,97.35 120.475,96.375 127.825,96.375 128.4,96.95 R4.1@128.4,97 R6.2@129.6,97
Analog_Input_2: R3.2 X1.13 | length 5.8
  Top Layer w0.2: R3.2@130.75,95.6 135.364,95.6 135.984,96.22 X1.13@136.3,96.22
CD1_3: R17.2 T1.1 | length 2.4
  Top Layer w0.2: T1.1@156.94,46.9 v1(158.4,46.9)
  Bottom Layer w0.2: v1(158.4,46.9) R17.2@159.35,46.9
CD2_3: R19.2 T1.4 | length 2.4
  Top Layer w0.2: T1.4@156.94,49.9 v1(158.3,49.9)
  Bottom Layer w0.2: v1(158.3,49.9) R19.2@159.35,49.9
CD3_3: R21.2 T1.7 | length 2.4
  Top Layer w0.2: T1.7@156.94,52.9 v1(158.3,52.9)
  Bottom Layer w0.2: v1(158.3,52.9) R21.2@159.35,52.9
CD4_3: R25.2 T1.10 | length 2.4
  Top Layer w0.2: T1.10@156.94,55.9 v1(158.3,55.9)
  Bottom Layer w0.2: v1(158.3,55.9) R25.2@159.35,55.9
CEXT_2_4: C61.2 DD9.19 | length 2.4
  Top Layer w0.2: DD9.19@49,72.65 49.01,72.64 49.01,72.239 50.066,71.183 50.066,70.834 C61.2@50.2,70.7
CEXT_3_4: C60.2 DD9.20 | length 2.7
  Top Layer w0.2: DD9.20@49.5,72.65 49.5,72.414 49.523,72.39 49.657,72.39 50.9,71.148 50.9,70.9 C60.2@51.1,70.7
CLK25_MHZ_3: DD6.9 DD7.3 | length 5.6
  Top Layer w0.2: DD6.9@136.1,50.1 136.1,49.2 137.8,47.5 DD7.3@140.1,47.5
CLK25_MHZ_4: DD9.8 DD11.3 | length 3
  Top Layer w0.2: DD11.3@41.3,74.6 41.475,74.425 DD9.8@44.225,74.425
CLK25_REF_OUT_3: DD6.6 TP1.1 | length 16
  Top Layer w0.2: DD6.6@134.6,50.1 134.6,49.836 134.475,49.711 134.475,49.695 134.25,49.47 134.25,45.017 134.367,44.9 138.216,44.9 138.55,44.566 138.55,38.35 TP1.1@138.5,38.3
CLK25_REF_OUT_4: DD9.7 TP2.1 | length 12.3
  Top Layer w0.2: TP2.1@32.1,75.4 32.125,75.425 42.104,75.425 42.604,74.925 DD9.7@44.225,74.925
CX1_3: C29.2 T1.24 | length 1.7
  Top Layer w0.2: C29.2@146.4,46.9 T1.24@148.06,46.9
CX2_3: C30.2 T1.21 | length 1.8
  Top Layer w0.2: C30.2@146.4,49.6 146.483,49.683 146.883,49.683 146.938,49.738 147.898,49.738 T1.21@148.06,49.9
CX3_3: C31.2 T1.18 | length 1.7
  Top Layer w0.2: C31.2@146.4,52.9 T1.18@148.06,52.9
CX4_3: C32.2 T1.15 | length 1.7
  Top Layer w0.2: C32.2@146.4,55.9 T1.15@148.06,55.9
D1_3_N: T1.3 X5.2 | length 10.6
  Top Layer w0.1: T1.3@156.94,48.9 157.56,48.9 157.83,48.63 157.83,48.542 157.889,48.483 161.611,48.483 161.894,48.2 165.635,48.2 165.694,48.258 165.694,48.341 X5.2@164.71,49.325
D1_3_P: T1.2 X5.1 | length 10.7
  Top Layer w0.1: T1.2@156.94,47.9 157.56,47.9 157.83,48.17 157.83,48.258 157.889,48.317 161.542,48.317 161.826,48.034 165.704,48.034 165.811,48.141 167.164,48.141 X5.1@167.25,48.055
D2_3_N: T1.6 X5.6 | length 16.7
  Top Layer w0.1: T1.6@156.94,51.9 157.56,51.9 157.83,51.63 157.83,51.542 157.889,51.483 161.237,51.483 161.69,51.03 165.056,51.03 166.326,52.3 167.305,52.3 167.312,52.293 167.595,52.293 168.085,52.783 168.085,53.481 167.161,54.405 X5.6@164.71,54.405
D2_3_P: T1.5 X5.3 | length 12.8
  Top Layer w0.1: T1.5@156.94,50.9 157.56,50.9 157.83,51.17 157.83,51.258 157.889,51.317 161.168,51.317 161.621,50.864 165.125,50.864 166.395,52.134 167.236,52.134 167.295,52.075 167.295,50.64 X5.3@167.25,50.595
D3_3_N: T1.9 X5.5 | length 11.2
  Top Layer w0.1: T1.9@156.94,54.9 157.56,54.9 157.83,54.63 157.83,54.542 157.889,54.483 161.055,54.483 162.068,53.47 165.39,53.47 165.811,53.049 167.164,53.049 X5.5@167.25,53.135
D3_3_P: T1.8 X5.4 | length 11
  Top Layer w0.1: T1.8@156.94,53.9 157.56,53.9 157.83,54.17 157.83,54.258 157.889,54.317 160.986,54.317 161.999,53.304 165.322,53.304 165.694,52.932 165.694,52.849 X5.4@164.71,51.865
D4_3_N: T1.12 X5.8 | length 11.2
  Top Layer w0.1: T1.12@156.94,57.9 157.56,57.9 157.83,57.63 157.83,57.542 157.889,57.483 160.921,57.483 162.584,55.82 165.635,55.82 165.694,55.878 165.694,55.961 X5.8@164.71,56.945
D4_3_P: T1.11 X5.7 | length 11.3
  Top Layer w0.1: T1.11@156.94,56.9 157.56,56.9 157.83,57.17 157.83,57.258 157.889,57.317 160.852,57.317 162.516,55.654 165.704,55.654 165.811,55.761 167.164,55.761 X5.7@167.25,55.675
DATA_4_N: C58.2 L4.4 R34.1 X7.1 | length 13.6
  Top Layer w0.1: X7.1@44.3,49.3 43.192,49.3 43.133,49.359 43.133,50.775 43.133,53.441 43.192,53.5 C58.2@44.125,53.5 44.025,53.6 43.192,53.6 43.133,53.659 43.133,55.658 43.192,55.716 43.635,55.716 43.635,55.858 43.865,56.088 44.006,56.088 45.834,57.915 46.165,57.915 R34.1@46.3,58.05
DATA_4_P: C59.2 L4.3 R39.1 X7.2 | length 13.7
  Top Layer w0.1: R39.1@39.7,58.05 39.835,57.915 40.166,57.915 41.994,56.088 42.135,56.088 42.365,55.858 42.365,55.716 42.908,55.716 42.967,55.658 42.967,53.659 42.908,53.6 42.075,53.6 C59.2@41.975,53.5 42.908,53.5 42.967,53.441 42.967,50.706 42.967,49.359 42.908,49.3 X7.2@41.8,49.3
ETH_I\N\T\: DD1.41 DD6.22 R16.2 | length 44.5
  Top Layer w0.2: DD1.41@111.525,87.35 113.042,87.35 113.192,87.5 v1(113.3,87.5) ; v1(135.7,63.7) 135.7,61.178 136.15,60.728 136.15,56.464 136.1,56.414 DD6.22@136.1,56.15
  Bottom Layer w0.2: v1(113.3,87.5) 114.425,86.375 115.003,86.375 115.75,85.628 115.75,83.65 v1(135.7,63.7) R16.2@135.7,65.15
ETH_LED_0_3: DD6.21 LED1.1 R24.1 R27.2 | length 9.3
  Top Layer w0.2: DD6.21@136.6,56.15 136.6,58.55 138.675,60.625 138.725,60.625 138.95,60.85 R27.2@138.95,60.9 R24.1@138.95,62.2 LED1.1@138.95,64.45
ETH_LINK_ST: DD1.38 DD6.26 R28.2 | length 40.8